# Altium PCB PCB1.PcbDoc (part 1 of 2)
Units mm, origin at the board's own origin, x right, y up, seen from the top; angles counter-clockwise.
Board outline 79.12 x 76.83 mm, 4 copper layers (Top Layer, GND, PWR, Bottom Layer), stack 1.586 mm thick; 64 components, 60 nets, 265 pads, 89 vias.
Unrouted connection lines stored in the file: 60.
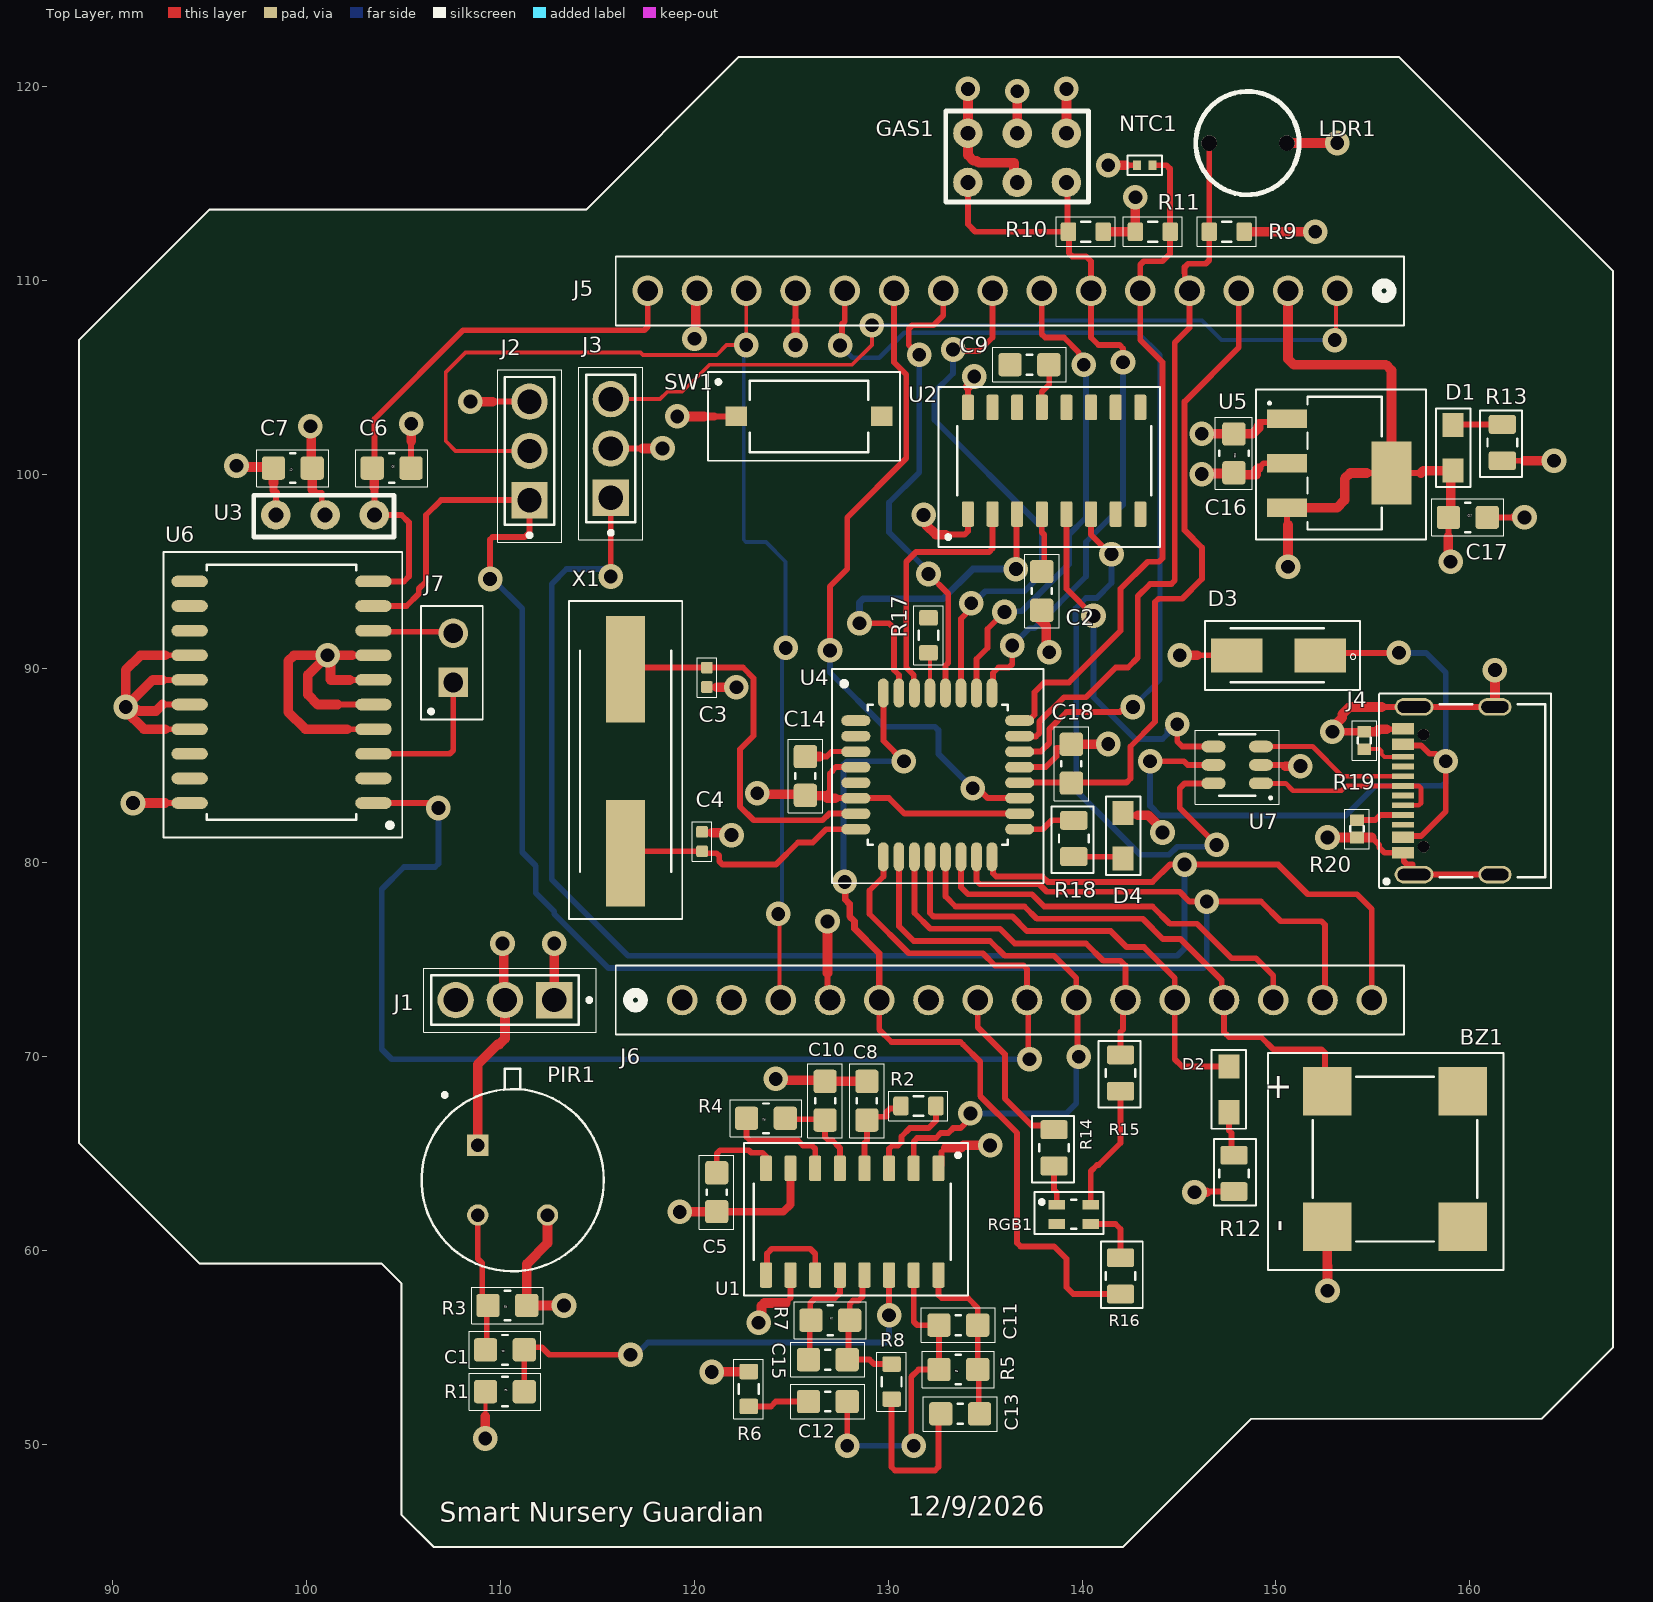
[diagram p0: Top Layer view]
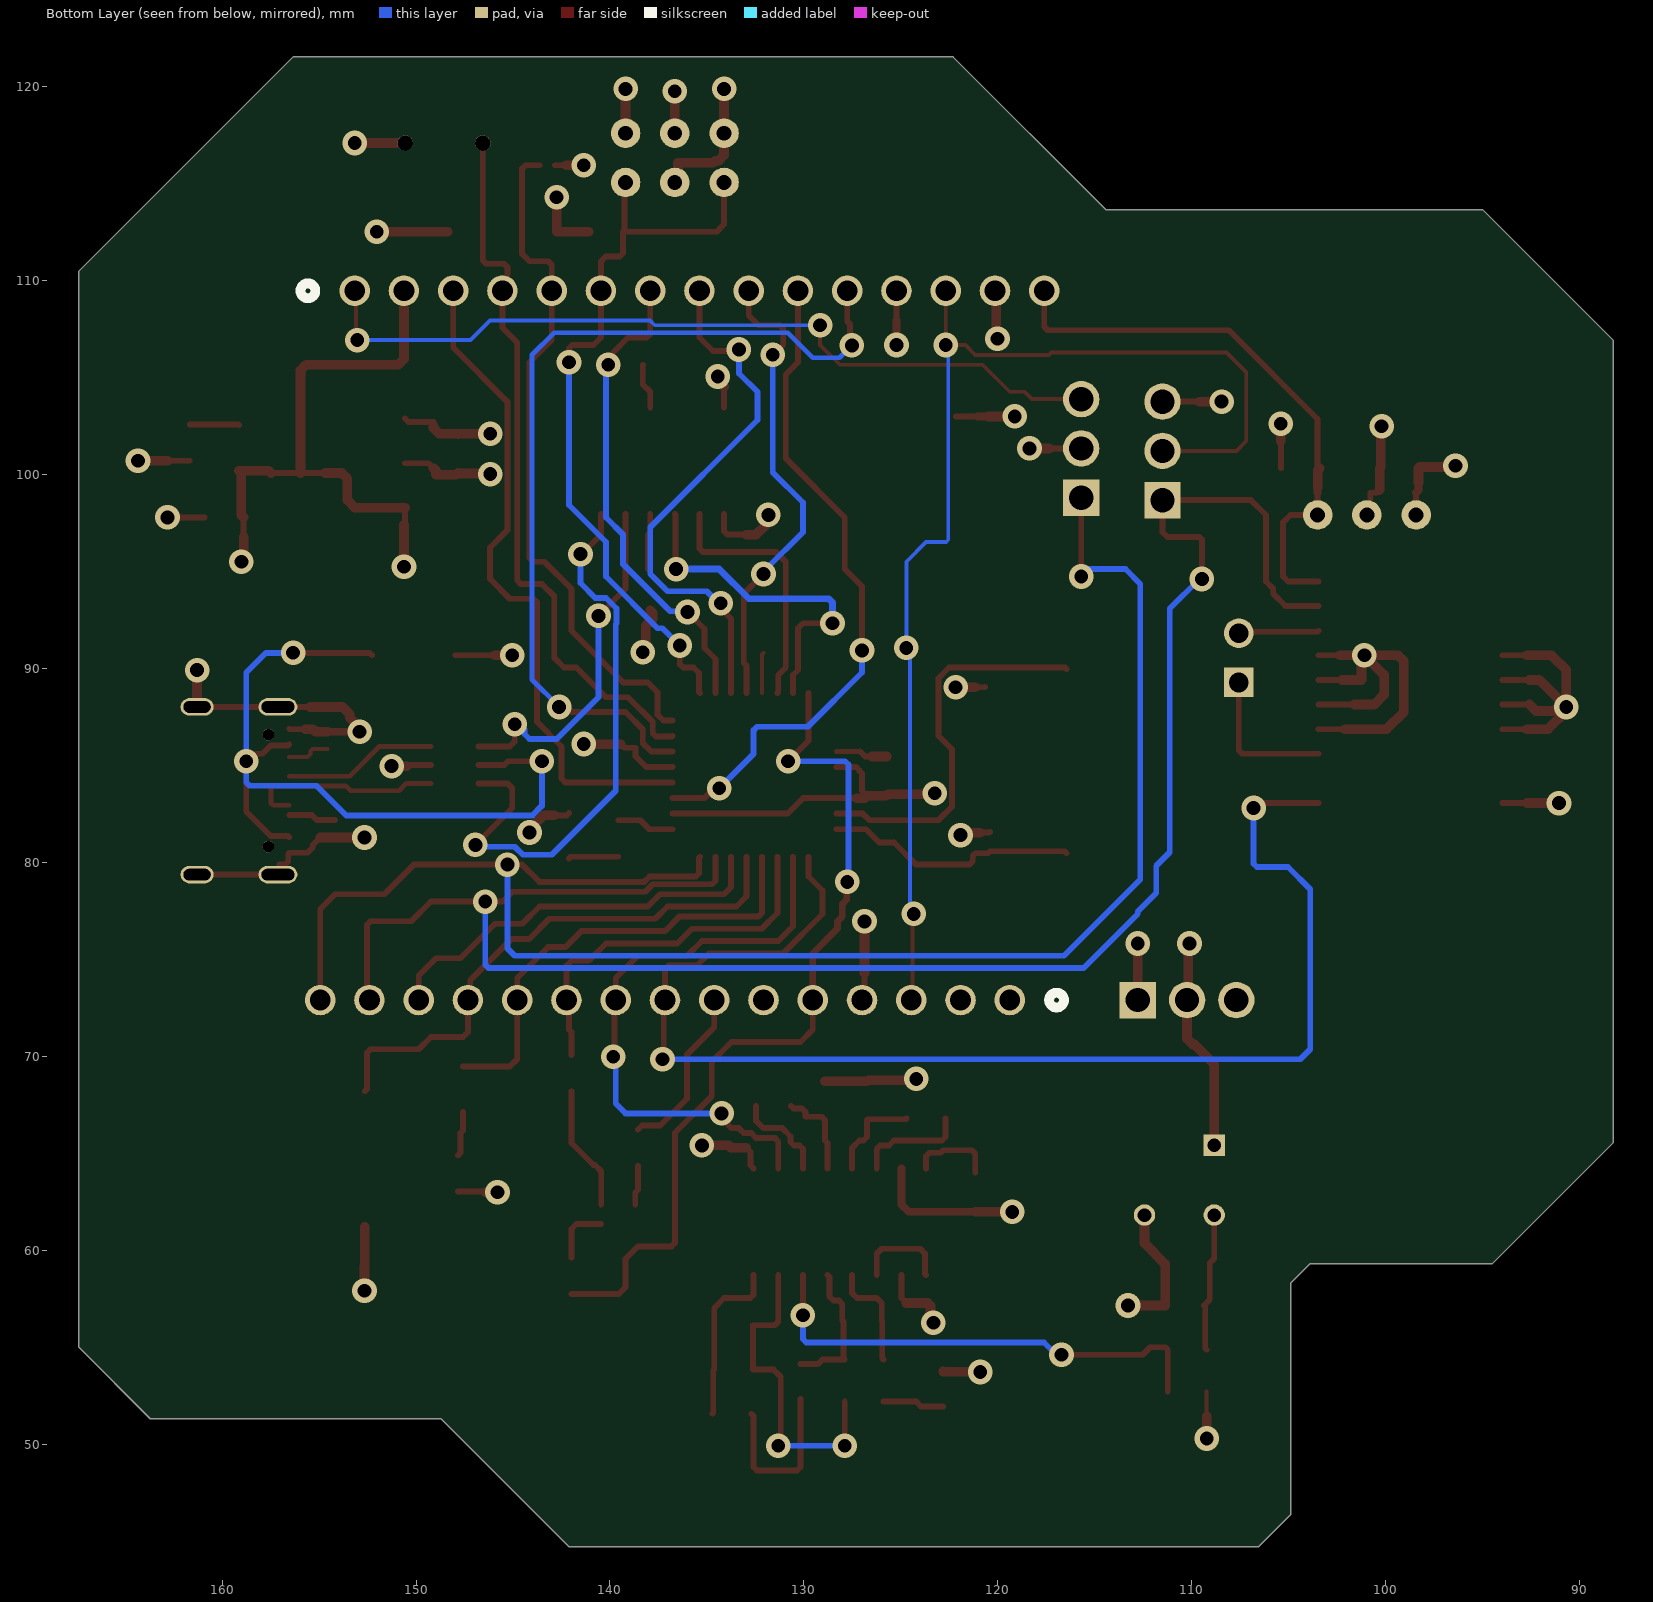
[diagram p1: Bottom Layer view, seen from below]
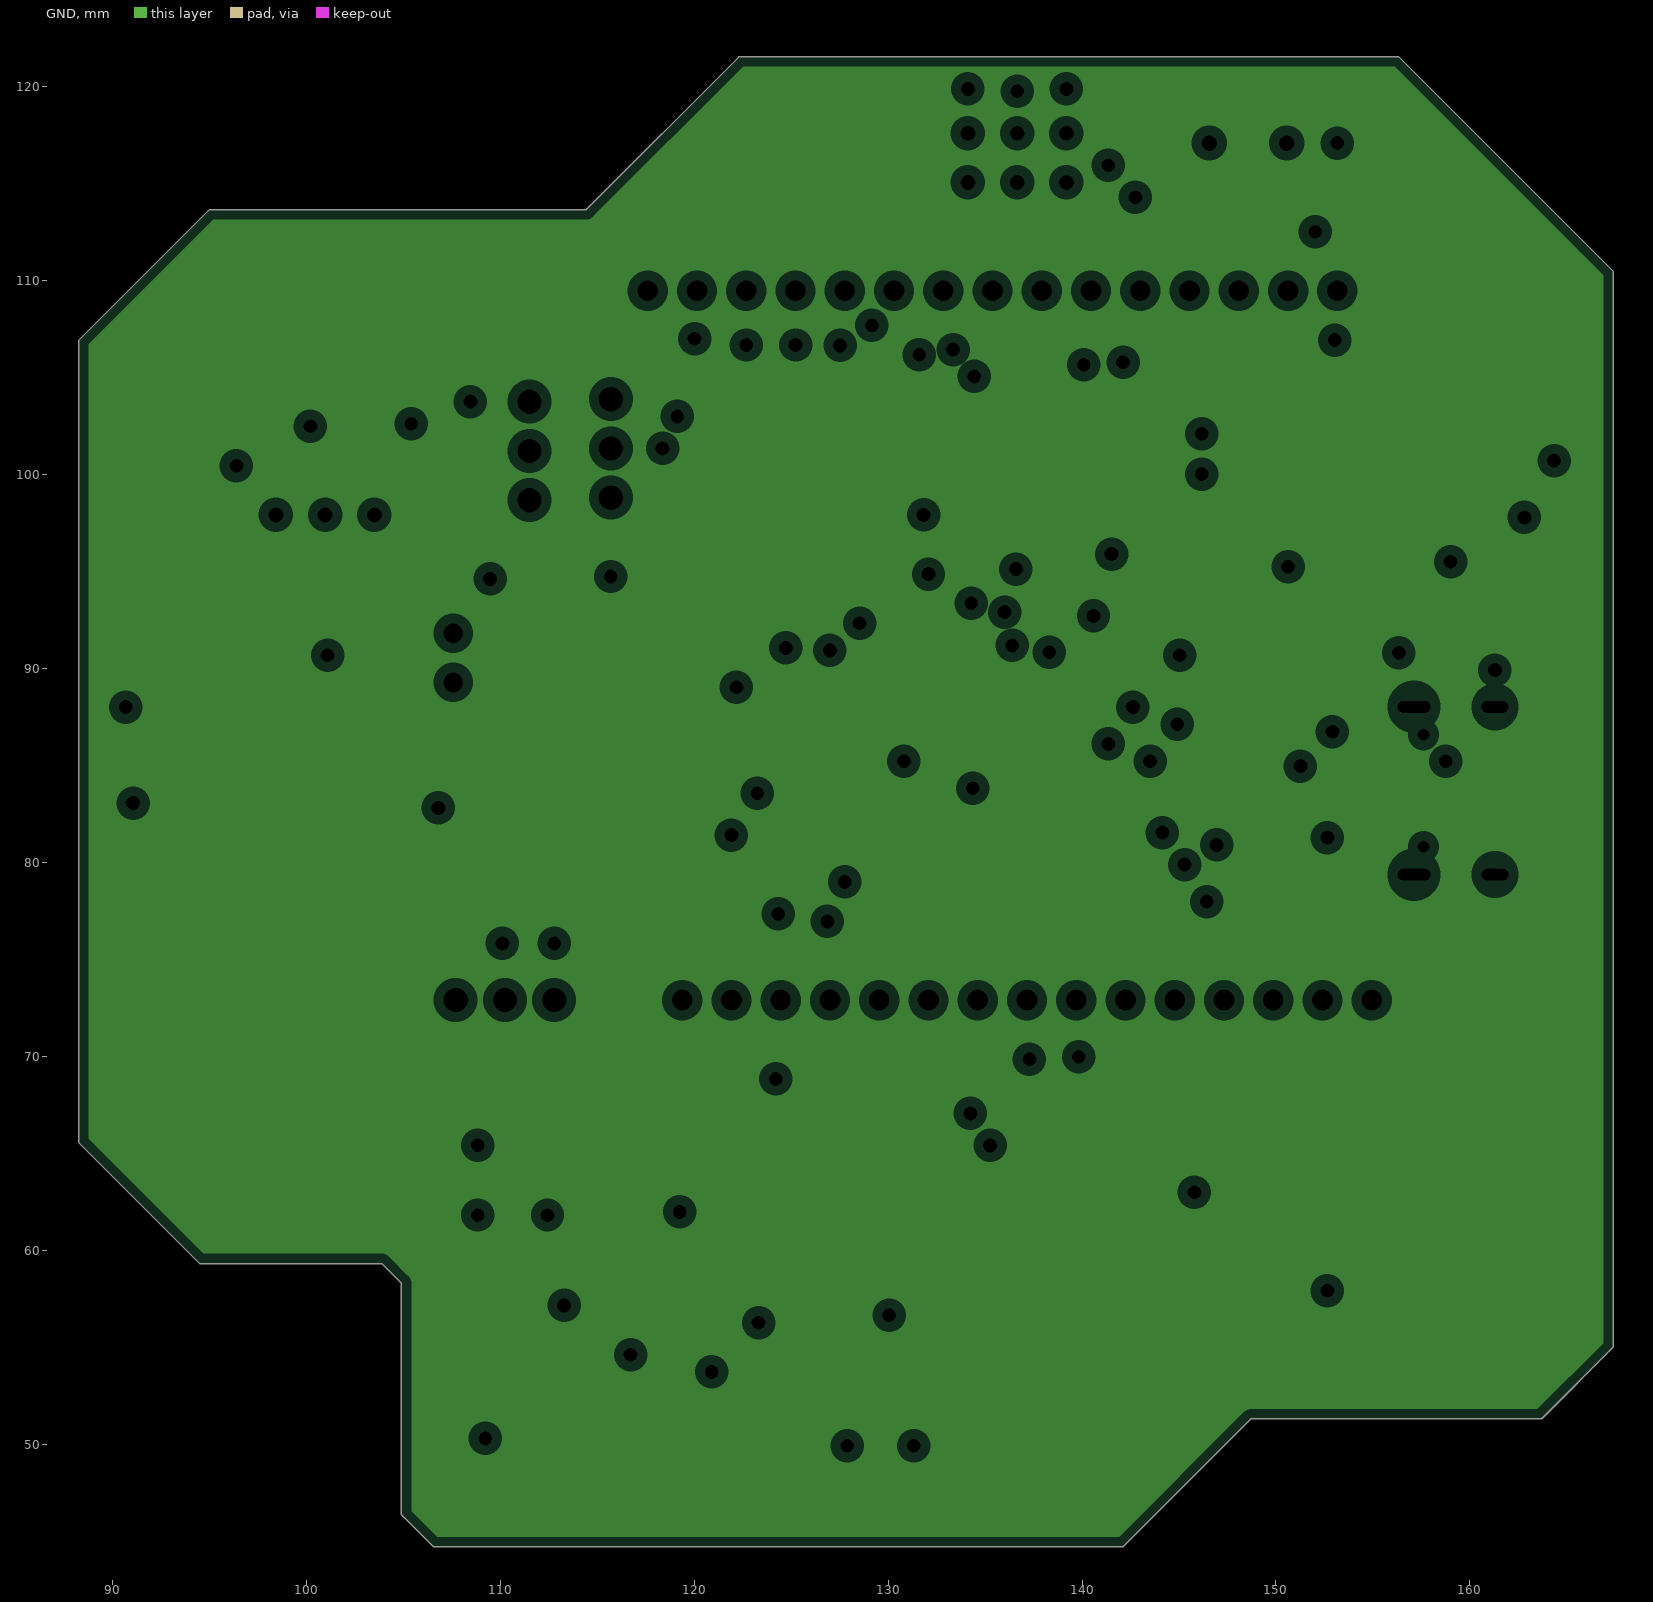
[diagram p2: GND, clearances drawn from the general rule]
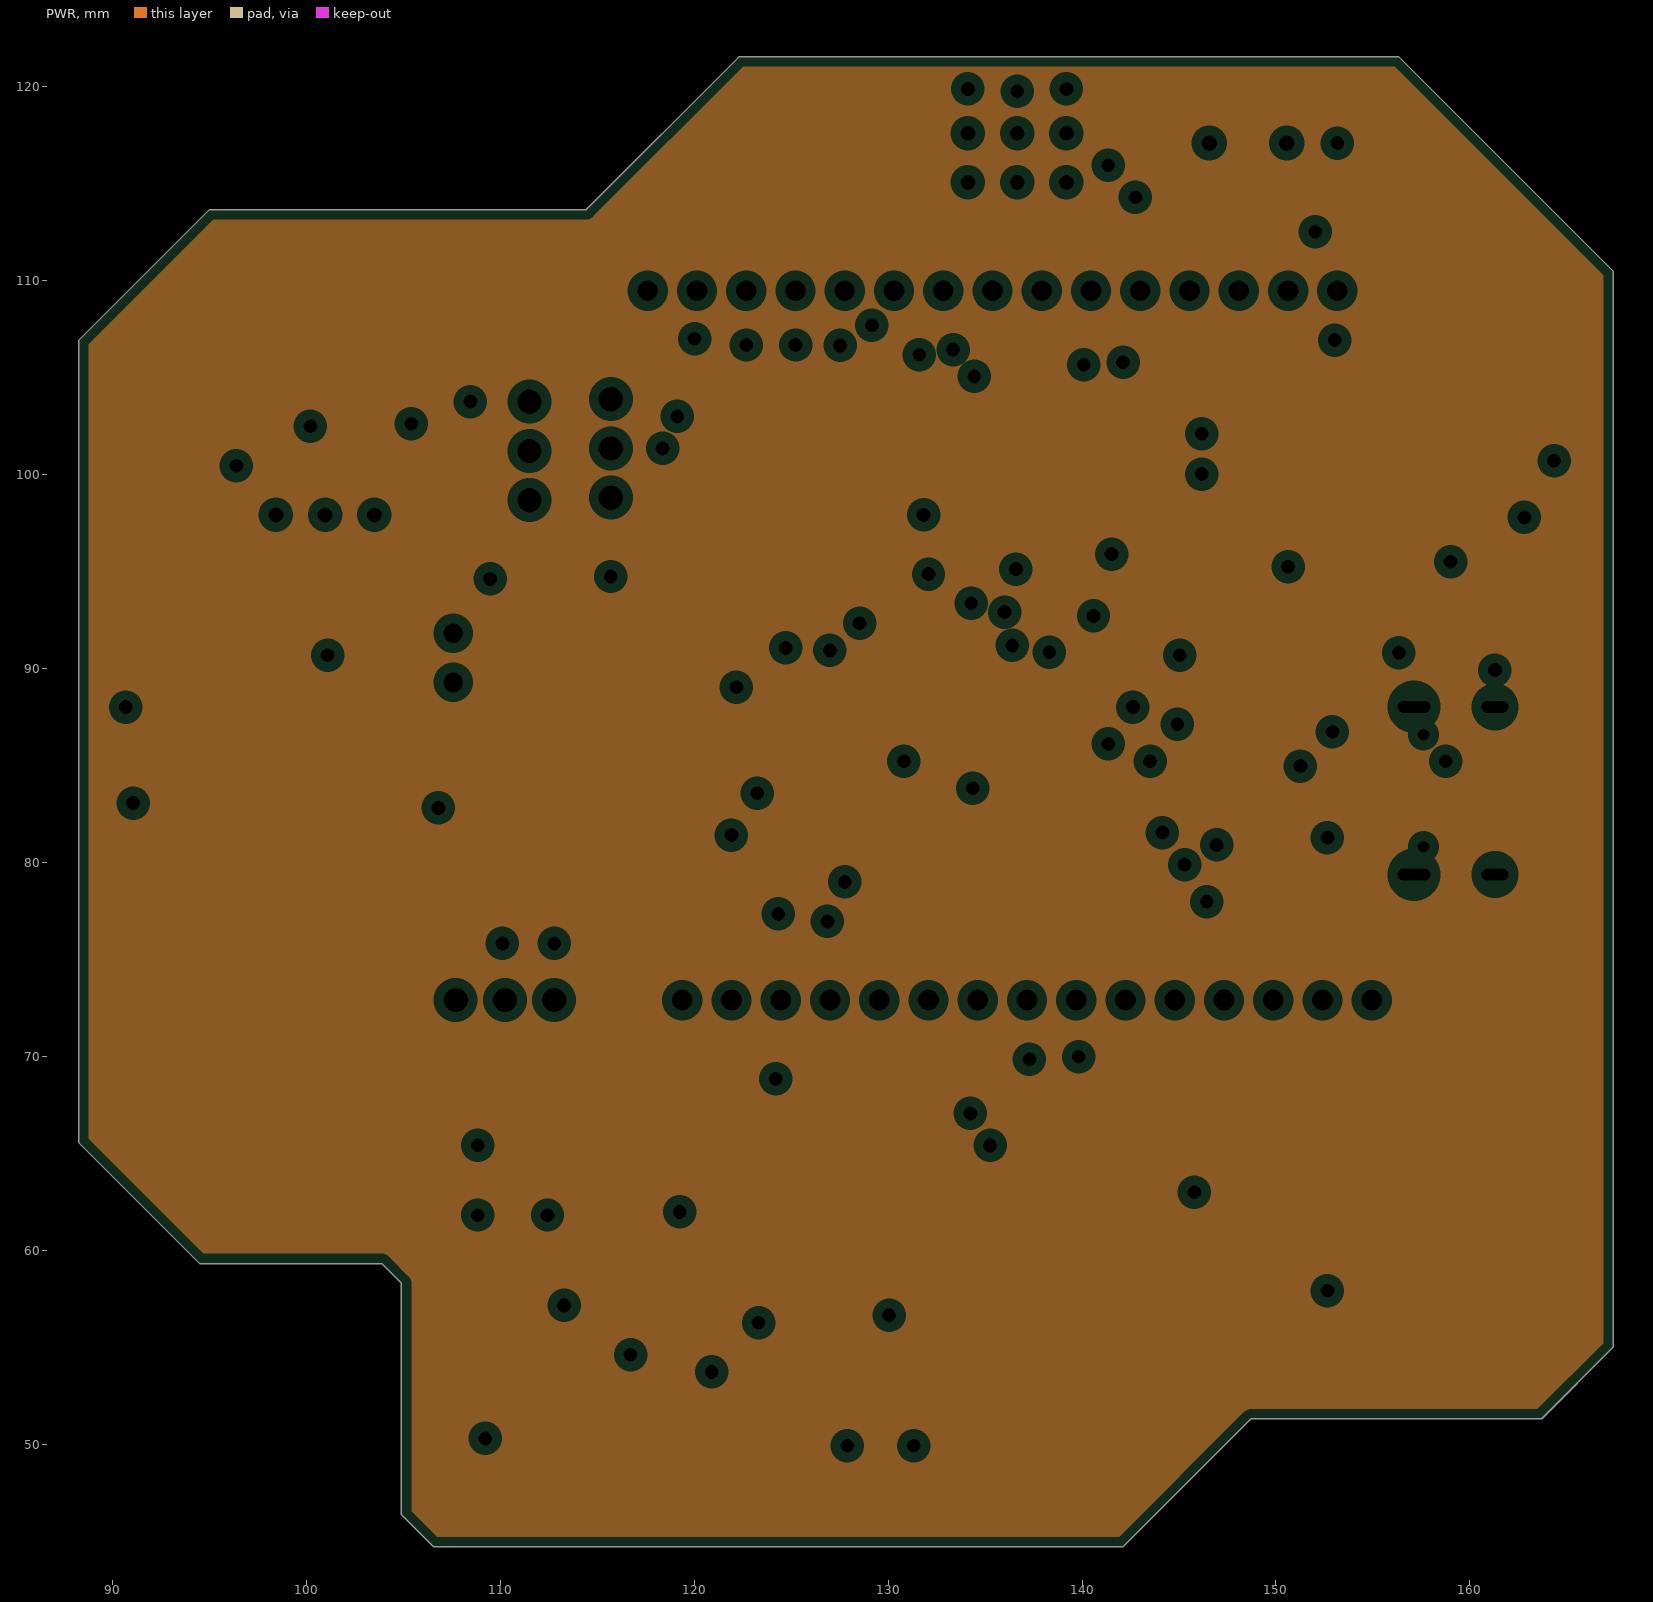
[diagram p3: PWR, clearances drawn from the general rule]
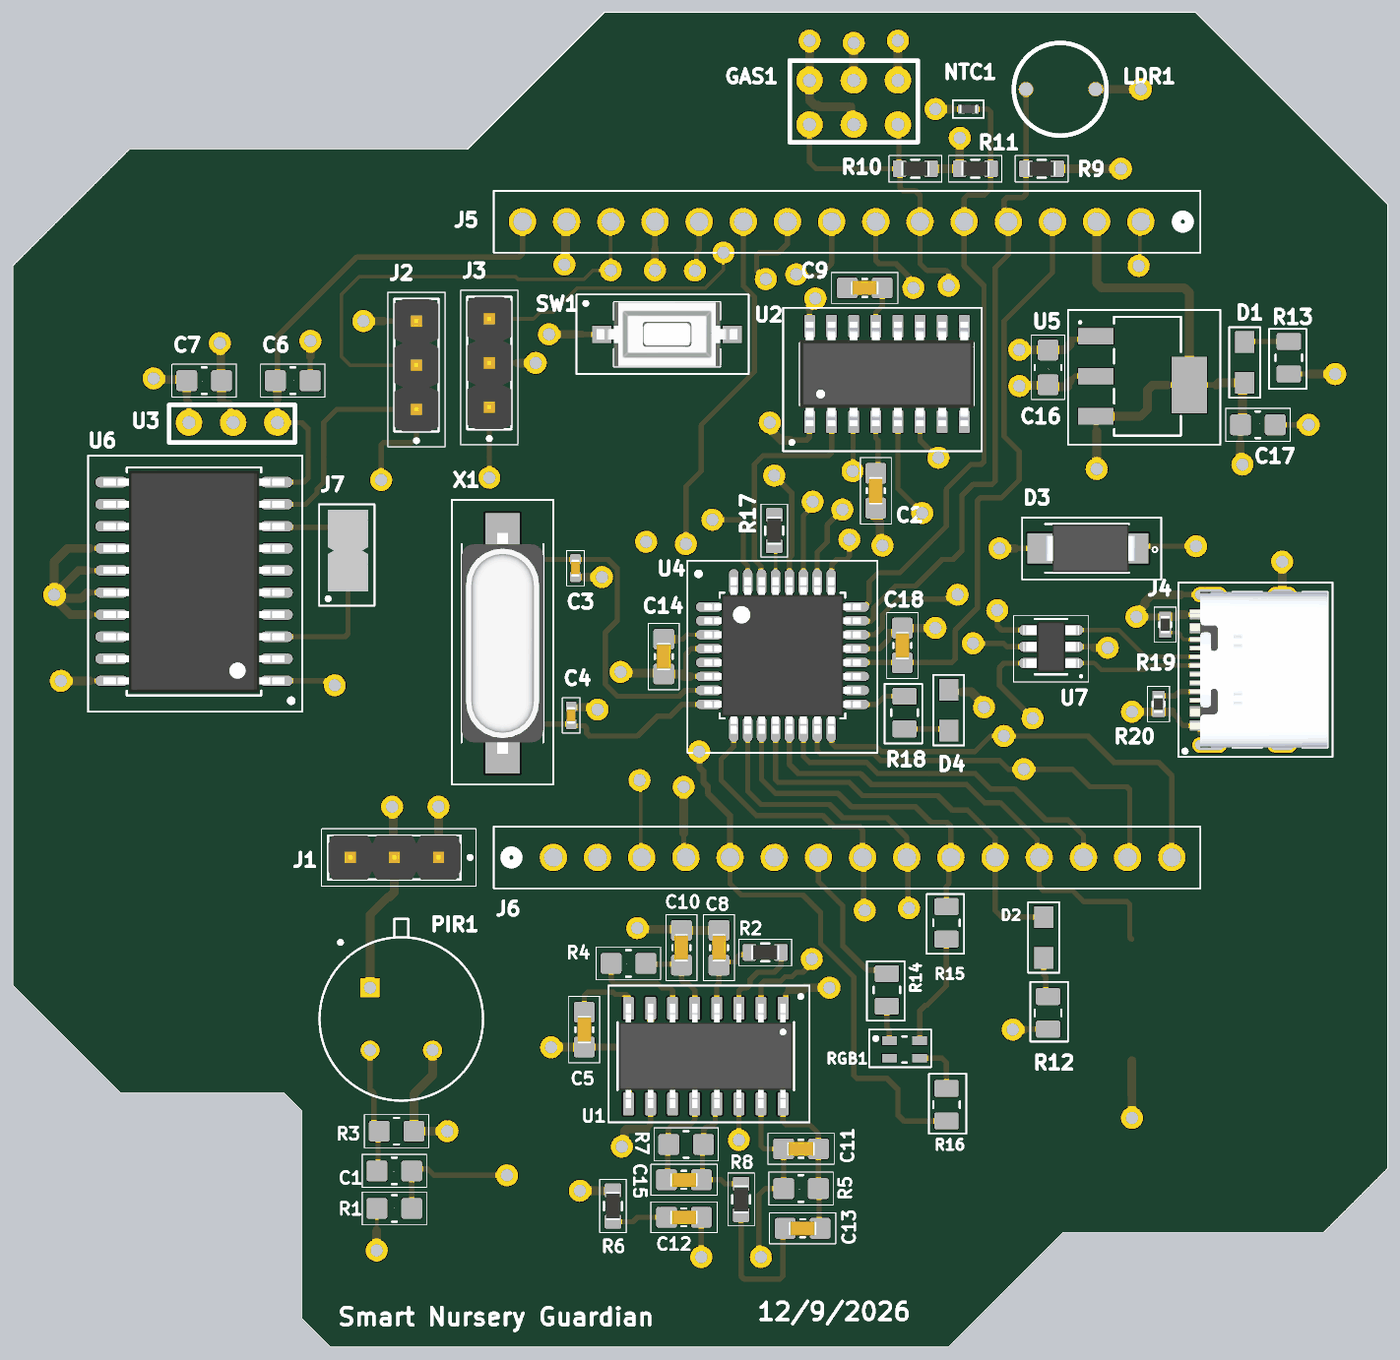
[diagram p4: 3D render of the assembled board from above, using the file's embedded part models]

## Layer stack, top to bottom
Top Solder: solder mask 0.0254, Solder Resist, Dk 4
Top Layer: signal copper 0.035
Dielectric 2: prepreg 0.2104, PP-017, Dk 4.4
GND: plane copper 0.0152, net GND
Dielectric 1: core 1.065, Core-039, Dk 4.6
PWR: plane copper 0.0152, net +5V
Dielectric 3: prepreg 0.2104, PP-017, Dk 4.4
Bottom Layer: signal copper 0.035
Bottom Solder: solder mask 0.0254, Solder Resist, Dk 4

## Board outline
94.488,59.309 103.886,59.309 104.902,58.293 104.902,46.355 106.553,44.704 142.113,44.704 148.717,51.308 163.703,51.308 167.386,54.991 167.386,110.49 165.989,111.887 156.337,121.539 122.301,121.539 114.427,113.665 94.996,113.665 88.265,106.934 88.265,65.532

## Design rules (kind name [scope] priority, off if disabled: settings)
BoardOutlineClearance [All] p1: gap=0.3 ignorepadtopadclearanceinfootprint=FALSE
Clearance [All] p1: gap=0.1 ignorepadtopadclearanceinfootprint=FALSE except(0.5: Via-Via Via-Fill Via-Poly Via-Region Via-Text Via-Hole)
MinimumSolderMaskSliver [All] p1: minsoldermaskwidth=0.127
PlaneClearance [All] p1: clearance=0.508
PlaneConnect [All] p1: planeconnectstyle=Relief reliefexpansion=0.508 reliefentries=4 reliefconductorwidth=0.254 reliefairgap=0.254
PolygonConnect [All] p1: connectstyle=Relief reliefconductorwidth=0.254 reliefentries=4 polygonreliefangle="90 Angle" airgapwidth=0.254
RoutingVias [All] p1: holewidth=0.3 width=0.6 viastyle="Through Hole" minholewidth=0.2 minwidth=0.45 maxholewidth=0.711 maxwidth=1.27
SilkToSilkClearance [All] p1: silktosilkclearance=0.15
SilkToSolderMaskClearance [IsPad] p1: minsilkscreentomaskgap=0.15 clearancetoexposedcopper=TRUE
SolderMaskExpansion [All] p1: expansion=0.05 istentingtop=FALSE
SupplyNets "Schematic Supply Nets_4" [InNet('VBUS')] p1: voltage=0.000
SupplyNets "Schematic Supply Nets_3" [InNet('+5V')] p2: voltage=0.000
SupplyNets "Schematic Supply Nets_2" [InNet('GND')] p3: voltage=0.000
SupplyNets "Schematic Supply Nets_1" [InNet('+3v3')] p4: voltage=0.000
SupplyNets "Schematic Supply Nets" [InNet('vin')] p5: voltage=0.000
Width [All] p1: maxlimit=5 minlimit=0.1 preferedwidth=0.2
25 further rules are at their usual default settings.

## Components (designator, comment, footprint, x,y, rotation, side; value= is the part's Value field where it differs from the comment)
BZ1 "5V Buzzer" Buzzer 201.859,75.748 r180 top
C1 "10uF" cap 110.236,54.864 r180 top
C2 "100nF" CAP_0603_100nf 138.43,94.631 r270 top
C3 "22pF" CAP_0402_22PF 120.65,89.543 r270 top
C4 "22pF" CAP_0402_22PF 120.403,81.071 r90 top
C5 "10nF" CAP_0603_100nf 121.666,63.627 r270 top
C6 "10uF" cap 104.394,100.33 r0 top
C7 "10uF" cap 99.298,100.33 r180 top
C8 "10nF" CAP_0603_100nf 128.397,67.072 r90 top
C9 "100nF" CAP_0603_100nf 137.922,105.156 r180 top
C10 "10nF" CAP_0603_100nf 126.238,67.072 r90 top
C11 "10nF" CAP_0603_100nf 134.255,55.626 r180 top
C12 "47uF" CAP_0603_100nf 126.254,52.705 r0 top
C13 "10nF" CAP_0603_100nf 134.35,51.054 r180 top
C14 "100nF" CAP_0603_100nf 125.222,83.82 r90 top
C15 "10nF" CAP_0603_100nf 126.254,54.864 r0 top
C16 "10uF" cap 147.828,101.092 r270 top
C17 "10uF" cap 159.893,97.79 r0 top
C18 "100nF" CAP_0603_100nf 138.938,84.455 r90 top
D1 "LED" LED_0805 159.385,106.077 r90 top
D2 "LED_0805" LED_0805 147.32,63.595 r270 top
D3 "SS14 DIODE" "SS14 DIODE" 150.146,91.567 r180 top
D4 "LED_0805" LED_0805 142.367,86.074 r90 top
GAS1 "gas_sensor" "gas_sensor - duplicate" 133.985,115.189 r270 top
J1 "Servo Pins" PIN_HEADER_1X3 112.649,73.025 r180 top
J2 "PIN_HEADER_1X3" PIN_HEADER_1X3 111.633,98.806 r90 top
J3 "PIN_HEADER_1X3" PIN_HEADER_1X3 115.824,98.933 r90 top
J4 "USB_C" USB_TYPE_C_16_PINS 159.131,80.645 r90 top
J5 "Analog Side" PIN_HEADER_1X15 135.382,109.474 r0 top
J6 "Digital Side" PIN_HEADER_1X15 137.16,72.898 r180 top
J7 "Motor Pins" PIN_HEADER_1X2 107.569,90.551 r90 top
LDR1 "LDR" LDR 150.558,117.094 r180 top
NTC1 "NTC" NTC 143.237,115.951 r180 top
PIR1 "PIR Sensor" "PIR_MOTION SENSOR" 110.635,63.609 r270 top
R1 "100kΩ" RESC2013X55N 110.236,52.705 r0 top
R2 "10KΩ" RES_10K_0603 133.212,67.183 r0 top
R3 "100kΩ" RESC2013X55N 110.363,57.15 r180 top
R4 "1MΩ" RESC2013X55N 123.698,66.802 r180 top
R5 "1MΩ" RESC2013X55N 133.62,53.848 r180 top
R6 "10KΩ" RES_10K_0603 122.555,51.192 r270 top
R7 "1MΩ" RESC2013X55N 127.016,56.388 r0 top
R8 "10KΩ" RES_10K_0603 129.921,51.573 r270 top
R9 "10KΩ" RES_10K_0603 149.109,112.268 r0 top
R10 "10KΩ" RES_10K_0603 141.848,112.268 r0 top
R11 "10KΩ" RES_10K_0603 141.997,112.776 r180 top
R12 "330Ω" RESC2013X65N 147.828,63.96 r270 top
R13 "330Ω" RESC2013X65N 161.671,101.648 r90 top
R14 "330Ω" RESC2013X65N 138.557,65.278 r90 top
R15 "330Ω" RESC2013X65N 141.986,69.136 r90 top
R16 "330Ω" RESC2013X65N 141.986,58.674 r270 top
R17 "10KΩ" RES_10K_0603 131.826,90.054 r270 top
R18 "330Ω" RESC2013X65N 139.573,81.231 r90 top
R19 "5.1KΩ" RESC1005X40N 154.559,86.291 r90 top
R20 "5.1KΩ" RESC1005X40N 154.178,81.73 r270 top
RGB1 "RGB" RGB 139.573,61.849 r0 top
SW1 "RESET" RESET_SWITCH 123.758,100.965 r0 top
U1 "BISS0001" BISS0001 128.143,61.468 r270 top
U2 "CH340C" CH340C 138.557,100.711 r90 top
U3 "VoltageRegulator" regulator 98.298,95.504 r270 top
U4 "ATmega328P" TQFP80P900X900X120-32N 132.554,84.512 r0 top
U5 "AMS1117-3V3" SOT230P700X180-4N 153.543,100.584 r0 top
U6 "L293D IC" SOIC127P1040X250-20N 98.718,88.773 r180 top
U7 "USBLC6-2SC6" SOT95P280X145-6N 148,85.024 r180 top
X1 "16MHz Crystal" "16MHz Crystal" 116.459,85.217 r270 top

## Footprints (in the part's own frame and the unit in brackets; to place one, negate y for a bottom-side part, rotate by r counter-clockwise, add the part's x,y. Pads: shape width x height; smd on the part's side, far side on the other; paste and mask are expansions set on the pad)
"16MHz Crystal" [mm]
  rect 5.5x2 smd paste+0 mask+0.102: 1(-4.75,0) 2(4.75,0)
  silkscreen extent -8.25,-2.92 8.13,2.92, body extent -6.35,-2.35 6.35,2.35, height 3.3
BISS0001 [mm]
  rrect25% 1.31x0.62 smd paste+0 mask+0.102: 1(-2.75,4.445) 2(-2.75,3.175) 3(-2.75,1.905) 4(-2.75,0.635) 5(-2.75,-0.635) 6(-2.75,-1.905) 7(-2.75,-3.175) 8(-2.75,-4.445) 9(2.75,-4.445) 10(2.75,-3.175) 11(2.75,-1.905) 12(2.75,-0.635) 13(2.75,0.635) 14(2.75,1.905) 15(2.75,3.175) 16(2.75,4.445)
  silkscreen extent -4.06,-5.59 3.81,5.97, body extent -3,-5 3,5, height 1.8
Buzzer [mm]
  rect 2.5x2.5 smd: 1(42.22,14.549) 2(42.22,7.549) N(49.22,14.549) P(49.22,7.549)
  silkscreen extent 40.13,5.59 52.27,16.76, body extent 41.4,6.8 49.9,15.3, height 1
cap [mm] "Chip Resistor, 2-Leads, Body 2.00x1.27mm, IPC Medium Density"
  rrect25% 1.2x1.2 smd: 1(-1,0) 2(1,0)
  silkscreen extent -1.85,-0.95 1.85,0.95, body extent -1,-0.64 1,0.64, height 0.55
CAP_0402_22PF [mm] "Chip Capacitor, 2-Leads, Body 1.00x0.50mm, IPC Medium Density"
  rrect25% 0.6x0.6 smd: 1(-0.5,0) 2(0.5,0)
  silkscreen extent -1.02,-0.51 1.02,0.51, body extent -0.5,-0.25 0.5,0.25, height 0.55
CAP_0603_100nf [mm]
  rrect25% 1.2x1.2 smd: 1(-0.365,-0.508) 2(1.635,-0.508)
  silkscreen extent -1.27,-1.4 2.54,0.38, body extent -0.17,-0.91 1.44,-0.11, height 0.9
CH340C [mm]
  rrect25% 1.31x0.62 smd: 1(-2.75,4.445) 2(-2.75,3.175) 3(-2.75,1.905) 4(-2.75,0.635) 5(-2.75,-0.635) 6(-2.75,-1.905) 7(-2.75,-3.175) 8(-2.75,-4.445) 9(2.75,-4.445) 10(2.75,-3.175) 11(2.75,-1.905) 12(2.75,-0.635) 13(2.75,0.635) 14(2.75,1.905) 15(2.75,3.175) 16(2.75,4.445)
  silkscreen extent -4.45,-5.46 3.81,5.97, body extent -3,-5 3,5, height 1.8
"gas_sensor - duplicate" [mil]
  round 60 hole 30: 1(-95,205) 2(-95,105) 3(-95,5) 4(5,5) 5(5,105) 6(5,205)
  silkscreen extent -140,-40 45,250
LDR [mm]
  round 0.8 hole 0.8: 1(4,0) 2(0,0)
  silkscreen extent -0.64,-2.67 4.7,2.67
LED_0805 [mm]
  rect 1.25x1.1 smd: 1(-5.874,0.254) 2(-3.524,0.254)
  silkscreen extent -6.73,-0.64 -2.67,1.14
NTC [mm]
  rect 0.4x0.5 smd: 1(-0.4,0) 2(0.4,0)
  silkscreen extent -0.89,-0.51 0.89,0.51, body extent -0.5,-0.25 0.5,0.25, height 0.55
PIN_HEADER_1X2 [mm]
  rect 1.53x1.53 / inner round 1.53 / far side rect 1.53x1.53 hole 1.02: 1(-1.27,0)
  round 1.53 hole 1.02: 2(1.27,0)
  silkscreen extent -3.17,-1.52 2.67,1.65, body extent -2.34,-1.17 2.34,1.17, height 5.33
PIN_HEADER_1X3 [mm]
  rect 1.875x1.875 / inner round 1.875 / far side rect 1.875x1.875 hole 1.25: 1(-0.127,0.127)
  round 1.875 hole 1.25: 2(2.413,0.127) 3(4.953,0.127)
  silkscreen extent -2.29,-1.52 6.6,1.78, body extent -1.4,-1.14 6.22,1.4, height 7.27
PIN_HEADER_1X15 [mil]
  round 62 hole 42: 1(700,0) 2(600,0) 3(500,0) 4(400,0) 5(300,0) 6(200,0) 7(100,0) 8(0,0) 9(-100,0) 10(-200,0) 11(-300,0) 12(-400,0) 13(-500,0) 14(-600,0) 15(-700,0)
  silkscreen extent -765,-70 835,70
"PIR_MOTION SENSOR" [mm]
  rect 1.1x1.1 hole 0.7: 1(-1.796,-1.796)
  round 1.1 hole 0.7: 2(1.796,-1.796) 3(1.796,1.796)
  silkscreen extent -5.75,-4.7 4.7,4.7
regulator [mil]
  round 60 hole 30: 1(-95,205) 2(-95,105) 3(-95,5)
  silkscreen extent -135,-40 -50,245
RES_10K_0603 [mm]
  rrect25% 0.8x0.96 smd: 1(-2.551,0.254) 2(-0.751,0.254)
  silkscreen extent -3.17,-0.51 -0.13,1.02, body extent -2.45,-0.15 -0.85,0.65, height 0.55
RESC1005X40N [mm] "Chip Resistor, 2-Leads, Body 1.00x0.50mm, IPC Medium Density"
  rect 0.6x0.7 smd: 1(-0.45,0) 2(0.45,0)
  silkscreen extent -1.02,-0.64 1.02,0.64, body extent -0.49,-0.25 0.51,0.25, height 0.4
RESC2013X55N [mm] "Chip Resistor, 2-Leads, Body 2.00x1.27mm, IPC Medium Density"
  rrect25% 1.2x1.2 smd: 1(-1,0) 2(1,0)
  silkscreen extent -1.85,-0.95 1.85,0.95, body extent -1,-0.64 1,0.64, height 0.55
RESC2013X65N [mm] "Chip Resistor, 2-Leads, Body 2.00x1.27mm, IPC Medium Density"
  rrect25% 0.975x1.4 smd: 1(0.938,0) 2(-0.937,0)
  silkscreen extent -1.78,-1.02 1.65,1.14, body extent -1,-0.64 1,0.64, height 0.65
RESET_SWITCH [mm]
  rect 1.1x1 smd: 1(-1.591,2.032) 2(5.909,2.032)
  silkscreen extent -3.05,-0.25 6.86,4.32, body extent -1.89,0.18 6.21,3.88, height 2.5
RGB [mm]
  rect 0.85x0.5 smd: 1(-0.875,0.5) 2(0.875,0.5) 3(-0.875,-0.5) 4(0.875,-0.5)
  silkscreen extent -2.03,-1.02 1.52,1.14
SOIC127P1040X250-20N [mm] "SOIC, 20-Leads, Body 12.75x7.50mm, Pitch 1.27mm, IPC Medium Density"
  oval 1.875x0.6 smd: 1(-4.737,5.715) 2(-4.737,4.445) 3(-4.737,3.175) 4(-4.737,1.905) 5(-4.737,0.635) 6(-4.737,-0.635) 7(-4.737,-1.905) 8(-4.737,-3.175) 9(-4.737,-4.445) 10(-4.737,-5.715) 11(4.738,-5.715) 12(4.738,-4.445) 13(4.738,-3.175) 14(4.738,-1.905) 15(4.738,-0.635) 16(4.738,0.635) 17(4.738,1.905) 18(4.738,3.175) 19(4.738,4.445) 20(4.738,5.715)
  silkscreen extent -6.22,-7.24 6.1,7.49, body extent -5.21,-6.38 5.21,6.38, height 2.5
SOT95P280X145-6N [mm] "SOT23, 6-Leads, Body 2.93x2.80mm, Pitch 0.95mm, IPC Medium Density"
  oval 1.25x0.6 smd: 1(-1.225,0.95) 2(-1.225,0) 3(-1.225,-0.95) 4(1.225,-0.95) 5(1.225,0) 6(1.225,0.95)
  silkscreen extent -2.16,-1.78 2.16,2.03, body extent -1.6,-1.46 1.6,1.46, height 1.45
SOT230P700X180-4N [mm] "SOT223, 4-Leads, Body 6.51x7.00mm (avg), Pitch 2.30mm, IPC Medium Density"
  rect 2.05x0.95 smd: 1(-2.975,0) 2(-2.975,-2.3) 3(-2.975,2.3)
  rect 2.05x3.25 smd: 4(2.413,-0.508)
  silkscreen extent -4.57,-3.94 4.19,3.81, body extent -1.75,-3.25 1.75,3.25, height 1.8
"SS14 DIODE" [mm]
  rect 2.65x1.75 smd paste+0 mask+0.102: P1(-2.127,0.889) P2(2.173,0.889)
  silkscreen extent -4.19,-0.89 3.81,2.67, body extent -2.73,-0.47 2.47,2.25, height 2.5
TQFP80P900X900X120-32N [mm] "TQFP, 32-Leads, Body 7.00x7.00mm, Pitch 0.80mm, IPC Medium Density"
  oval 1.5x0.55 smd: 1(-4.225,2.8) 2(-4.225,2) 3(-4.225,1.2) 4(-4.225,0.4) 5(-4.225,-0.4) 6(-4.225,-1.2) 7(-4.225,-2) 8(-4.225,-2.8) 17(4.225,-2.8) 18(4.225,-2) 19(4.225,-1.2) 20(4.225,-0.4) 21(4.225,0.4) 22(4.225,1.2) 23(4.225,2) 24(4.225,2.8)
  oval 0.55x1.5 smd: 9(-2.8,-4.225) 10(-2,-4.225) 11(-1.2,-4.225) 12(-0.4,-4.225) 13(0.4,-4.225) 14(1.2,-4.225) 15(2,-4.225) 16(2.8,-4.225) 25(2.8,4.225) 26(2,4.225) 27(1.2,4.225) 28(0.4,4.225) 29(-0.4,4.225) 30(-1.2,4.225) 31(-2,4.225) 32(-2.8,4.225)
  silkscreen extent -5.46,-5.59 5.46,5.46, body extent -4.5,-4.5 4.5,4.5, height 1.2
USB_TYPE_C_16_PINS [mm]
  rect 0.6x1.14 smd mask+0.05: A1(-0.152,2.591) A4(0.648,2.591) A9(5.448,2.591) A12(6.248,2.591)
  rect 0.3x1.14 smd mask+0.05: A5(1.798,2.591) A6(2.798,2.591) A7(3.298,2.591) A8(4.298,2.591) B5(4.798,2.591) B6(3.798,2.591) B7(2.298,2.591) B8(1.298,2.591)
  oval 0.9x2 hole 0.6 slot 1.7 at 90 deg: S1(-1.277,2.011) S2(7.373,2.011)
  oval 0.9x1.7 hole 0.6 slot 1.4 at 90 deg: S3(-1.277,-2.159) S4(7.373,-2.159)
  round 0.6 hole 0.6 unplated: ""(0.158,1.521) ""(5.938,1.521)
  silkscreen extent -1.97,-5.05 8.07,3.81, body extent -1.42,-4.76 7.52,3.15, height 3.31

## Part data
BZ1: "Electro-Magnetic Buzzer (SMD Type)", MFR=Huaneng, MFR part #=MLT-8530, ComponentLink1Description="New link", ComponentLink1URL=https://www.lcsc.com/product-detail/C94599.html, ComponentLink2Description=Datasheet, ComponentLink2URL=https://www.lcsc.com/datasheet/C94599.pdf?spm=wm.sxq.inf.ggs&lcsc_vid=EVULUAZXQgMNAwVTEQcNAVxTFlNbX1YFFVgNBV1RQ1kxVlNeTlFaV1ReR1hfUjsOAxUeFF5JWAYLCg0IHk8JCAsBGwRABAsLWA%3D%3D, supplier=LCSC, supplier part #=C94599
C1 C6 C7 C16 C17: "CAP CER 10uF 25V X5R 0805", MFR="Taiyo Yuden", MFR part #=TMK212BBJ106KG-T, ComponentLink1Description="New link", ComponentLink1URL=https://www.lcsc.com/product-detail/C386085.html?s_z=n_q_t_capacitor%25200805%2520&spm=wm.fly.bg.0.xh___wm.ssy.tc.0.tz&lcsc_vid=RQUMVgBfFQNaX1cDEQBcUQJeElRWU1MCTwJYVlNRQlExVlNeTlBaUldRQ1hZXzsOAxUeFF5JWBYZEEoKFBINSQcJGk4dAgUUFAk%3D, ComponentLink2Description=datasheet, ComponentLink2URL=https://www.lcsc.com/datasheet/C386085.pdf?spm=wm.sxq.inf.ggs___wm.fly.bg.0.xh&lcsc_vid=RQUMVgBfFQNaX1cDEQBcUQJeElRWU1MCTwJYVlNRQlExVlNeTlBaUldRQ1hZXzsOAxUeFF5JWBYZEEoKFBINSQcJGk4dAgUUFAk%3D, supplier=lcsc, supplier part #=C386085
C2 C9 C14 C18: "CAP CER 100nF 50V X7R 0603", MFR="Samsung Electro-Mechanics", MFR part #=CL10B104KB8NNNC, ComponentLink1Description="New link", ComponentLink1URL=https://www.lcsc.com/product-detail/C1591.html?s_z=n_q_p_cap%2520100n%2520&spm=wm.ssy.bg.0.xh&lcsc_vid=EgReBFUDQwddVldUQgMNAlFTFlRdVlRRRAUNAVZRRlIxVlNeQFRWUFBTQ1lcVjsOAxUeFF5JWBYZEEoKFBINSQcJGk4NBhADEA4cHktQQlBADxALGw%3D%3D, ComponentLink2Description="data sheet", ComponentLink2URL=https://www.lcsc.com/datasheet/C1591.pdf?spm=wm.sxq.inf.ggs___wm.ssy.bg.0.xh&lcsc_vid=EgReBFUDQwddVldUQgMNAlFTFlRdVlRRRAUNAVZRRlIxVlNeQFRWUFBTQ1lcVjsOAxUeFF5JWBYZEEoKFBINSQcJGk4NBhADEA4cHktQQlBADxALGw%3D%3D, supplier=LCSC, supplier part #=C1591
C3 C4: "CAP CER 22pF 50V NP0 0402", MFR=YAGEO, MFR part #=CC0402JRNPO9BN220, ComponentLink1Description="New link", ComponentLink1URL=https://www.lcsc.com/product-detail/C106203.html?s_z=n_q_t_22pf&spm=wm.fly.bg.4.xh___wm.ssy.tc.0.tz&lcsc_vid=EVULUAZXQgMNAwVTEQcNAVxTFlNbX1YFFVgNBV1RQ1kxVlNeT1lcV1RUTlRbVzsOAxUeFF5JWBYZEEoKFBINSQcJGk4eFQsCAgIaSgADAwAHC0slRlNYUFJIHxUDCw%3D%3D, ComponentLink2Description=datasheet, ComponentLink2URL=https://www.lcsc.com/datasheet/C106203.pdf?spm=wm.sxq.inf.ggs___wm.fly.bg.4.xh&lcsc_vid=EVULUAZXQgMNAwVTEQcNAVxTFlNbX1YFFVgNBV1RQ1kxVlNeT1lcV1RUTlRbVzsOAxUeFF5JWBYZEEoKFBINSQcJGk4eFQsCAgIaSgADAwAHC0slRlNYUFJIHxUDCw%3D%3D, supplier=LCSC, supplier part #=C106203
C5 C8 C10 C11 C13 C15: "CAP CER 10nF 50V X7R 0603", MFR=YAGEO, MFR part #=CC0603KRX7R9BB103, ComponentLink1Description="New link", ComponentLink1URL=https://www.lcsc.com/product-detail/C100042.html?s_z=n_q_t_10NF&spm=wm.fly.bg.1.xh___wm.ssy.tc.0.tz&lcsc_vid=EVULUAZXQgMNAwVTEQcNAVxTFlNbX1YFFVgNBV1RQ1kxVlNeTlBbXl1QRlNbUzsOAxUeFF5JWBYZEEoKFBINSQcJGk4eFQsCAgIaSgADAwAHC0slRVhdVFZeR08GEwkK, ComponentLink2Description="data sheet", ComponentLink2URL=https://www.lcsc.com/datasheet/C100042.pdf?spm=wm.sxq.inf.ggs___wm.fly.bg.1.xh&lcsc_vid=EVULUAZXQgMNAwVTEQcNAVxTFlNbX1YFFVgNBV1RQ1kxVlNeTlBbXl1QRlNbUzsOAxUeFF5JWBYZEEoKFBINSQcJGk4eFQsCAgIaSgADAwAHC0slRVhdVFZeR08GEwkK, supplier=LCSC, supplier part #=C100042
C12: "CAP CER 47uF 6.3V X5R 0603", MFR=muRata, MFR part #=GRM188R60J476ME15D, ComponentLink1Description="New link", ComponentLink1URL=https://www.lcsc.com/product-detail/C140782.html?s_z=n_q_t_47UF&spm=wm.fly.bg.10.xh___wm.ssy.tc.2.tz&lcsc_vid=EVULUAZXQgMNAwVTEQcNAVxTFlNbX1YFFVgNBV1RQ1kxVlNeTlNfUVJXQ1JfVzsOAxUeFF5JWBYZEEoKFBINSQcJGk4%3D, ComponentLink2Description="data sheet", ComponentLink2URL=https://www.lcsc.com/datasheet/C140782.pdf?spm=wm.sxq.inf.ggs___wm.fly.bg.10.xh&lcsc_vid=EVULUAZXQgMNAwVTEQcNAVxTFlNbX1YFFVgNBV1RQ1kxVlNeTlNfUVJXQ1JfVzsOAxUeFF5JWBYZEEoKFBINSQcJGk4%3D, supplier=LCSC, supplier part #=C140782
D1: library part LED_0805, "LED RED 0805 SMD", MFR=YONGYUTAI, MFR part #=YLED0805R, ComponentLink1Description="New link", ComponentLink1URL=https://www.lcsc.com/product-detail/C19171391.html?s_z=n_q_t_0805%2520LED&spm=wm.fly.bg.0.xh___wm.ssy.tc.0.tz&lcsc_vid=T1QNA1xeQFcIAlReRFQMVgBVFlhZUV1RE1VaUQcHQgQxVlNeQVZfVlRRQFZdUTsOAxUeFF5JWBYZEEoKFBINSQcJGk4NBhADEA4cHktSRlNADxALGw%3D%3D, ComponentLink2Description="data sheet", ComponentLink2URL=https://www.lcsc.com/datasheet/C19171391.pdf?spm=wm.sxq.inf.ggs___wm.fly.bg.0.xh&lcsc_vid=T1QNA1xeQFcIAlReRFQMVgBVFlhZUV1RE1VaUQcHQgQxVlNeQVZfVlRRQFZdUTsOAxUeFF5JWBYZEEoKFBINSQcJGk4NBhADEA4cHktSRlNADxALGw%3D%3D, supplier=LCSC, supplier part #=C19171391
D2 D4: "LED RED 0805 SMD", MFR=YONGYUTAI, MFR part #=YLED0805R, ComponentLink1Description="New link", ComponentLink1URL=https://www.lcsc.com/product-detail/C19171391.html?s_z=n_q_t_0805%2520LED&spm=wm.fly.bg.0.xh___wm.ssy.tc.0.tz&lcsc_vid=T1QNA1xeQFcIAlReRFQMVgBVFlhZUV1RE1VaUQcHQgQxVlNeQVZfVlRRQFZdUTsOAxUeFF5JWBYZEEoKFBINSQcJGk4NBhADEA4cHktSRlNADxALGw%3D%3D, ComponentLink2Description="data sheet", ComponentLink2URL=https://www.lcsc.com/datasheet/C19171391.pdf?spm=wm.sxq.inf.ggs___wm.fly.bg.0.xh&lcsc_vid=T1QNA1xeQFcIAlReRFQMVgBVFlhZUV1RE1VaUQcHQgQxVlNeQVZfVlRRQFZdUTsOAxUeFF5JWBYZEEoKFBINSQcJGk4NBhADEA4cHktSRlNADxALGw%3D%3D, supplier=LCSC, supplier part #=C19171391
D3: "DIODE SCHOTTKY 40V SMA(DO-214AC)", MFR="MDD(Microdiode Semiconductor)", MFR part #=SS14, ComponentLink1Description="New link", ComponentLink1URL=https://www.lcsc.com/product-detail/C2480.html?s_z=n_q_x_SS14&spm=wm.ssy.em.0.tz&lcsc_vid=EVULUAZXQgMNAwVTEQcNAVxTFlNbX1YFFVgNBV1RQ1kxVlNeTlBYV1VVQ1NWXzsOAxUeFF5JWBYZEEoKFBINSQcJGk4NBhADEA4cHktXRlhXSQwSGg0%3D, ComponentLink2Description=datasheet, ComponentLink2URL=https://www.lcsc.com/datasheet/C2480.pdf?spm=wm.sxq.inf.ggs___wm.ssy.em.0.tz&lcsc_vid=EVULUAZXQgMNAwVTEQcNAVxTFlNbX1YFFVgNBV1RQ1kxVlNeTlBYV1VVQ1NWXzsOAxUeFF5JWBYZEEoKFBINSQcJGk4NBhADEA4cHktXRlhXSQwSGg0%3D, supplier=lcsc, supplier part #=C2480
GAS1: "300ppm~10000ppm Through Hole Gas Sensors", MFR="Zhengzhou Winsen Elec Tech", MFR part #=MQ-2, ComponentLink1Description="New link", ComponentLink1URL=https://www.lcsc.com/product-detail/C99296.html?s_z=n_q_C99296&globalKeyword=C99296, ComponentLink2Description=datasheet, ComponentLink2URL=https://www.lcsc.com/datasheet/C99296.pdf?spm=wm.sxq.inf.ggs&lcsc_vid=RQUMVgBfFQNaX1cDEQBcUQJeElRWU1MCTwJYVlNRQlExVlNeTlBdXlZQQllaVDsOAxUeFF5JWBYZEEoKFBINSQcJGk4NBhADEA4cHkteQlRADxALGw%3D%3D, supplier=lcsc, supplier part #=C99296
J1: library part PIN_HEADER_1X3, "1kV 1 2.54mm Pin Header 3A 2.5mm Through Hole 6mm 3P -40℃~+105℃ 3mm Gold 1x3P Through Hole,P=2.54mm Headers, Male Pins", MFR=hanxia, MFR part #="HX PH254-01-03-Z-L11.5 pcb pin header", ComponentLink1Description="data sheet", ComponentLink1URL=https://www.lcsc.com/datasheet/C52016391.pdf?spm=wm.sxq.inf.ggs___wm.ssy.bg.1.xh&lcsc_vid=EgReBFUDQwddVldUQgMNAlFTFlRdVlRRRAUNAVZRRlIxVlNeQFRZXlFSR1dZVDsOAxUeFF5JWBYZEEoKFBINSQcJGk4NBhADEA4cHktfQVVADxALGw%3D%3D, ComponentLink2Description="New link 1", ComponentLink2URL=https://www.lcsc.com/product-detail/C52016391.html?s_z=n_q_p_Pin%2520Header%25202.54mm%25201x3&spm=wm.ssy.bg.1.xh&lcsc_vid=EgReBFUDQwddVldUQgMNAlFTFlRdVlRRRAUNAVZRRlIxVlNeQFRZXlFSR1dZVDsOAxUeFF5JWBYZEEoKFBINSQcJGk4NBhADEA4cHktfQVVADxALGw%3D%3D, supplier=lcsc, supplier part #=C52016391
J2 J3: "1kV 1 2.54mm Pin Header 3A 2.5mm Through Hole 6mm 3P -40℃~+105℃ 3mm Gold 1x3P Through Hole,P=2.54mm Headers, Male Pins", MFR=hanxia, MFR part #="HX PH254-01-03-Z-L11.5 pcb pin header", ComponentLink1Description="data sheet", ComponentLink1URL=https://www.lcsc.com/datasheet/C52016391.pdf?spm=wm.sxq.inf.ggs___wm.ssy.bg.1.xh&lcsc_vid=EgReBFUDQwddVldUQgMNAlFTFlRdVlRRRAUNAVZRRlIxVlNeQFRZXlFSR1dZVDsOAxUeFF5JWBYZEEoKFBINSQcJGk4NBhADEA4cHktfQVVADxALGw%3D%3D, ComponentLink2Description="New link 1", ComponentLink2URL=https://www.lcsc.com/product-detail/C52016391.html?s_z=n_q_p_Pin%2520Header%25202.54mm%25201x3&spm=wm.ssy.bg.1.xh&lcsc_vid=EgReBFUDQwddVldUQgMNAlFTFlRdVlRRRAUNAVZRRlIxVlNeQFRZXlFSR1dZVDsOAxUeFF5JWBYZEEoKFBINSQcJGk4NBhADEA4cHktfQVVADxALGw%3D%3D, supplier=lcsc, supplier part #=C52016391
J4: "CONN RCPT Type-C 16POS SMD", MFR="Korean Hroparts Elec", MFR part #=TYPE-C-31-M-12, ComponentLink1Description="New link", ComponentLink1URL=https://www.lcsc.com/product-detail/C165948.html?s_z=n_q_p_USB%2520TYPE%2520C&spm=wm.ssy.bg.1.xh&lcsc_vid=T1QNA1xeQFcIAlReRFQMVgBVFlhZUV1RE1VaUQcHQgQxVlNeQFVdUF1RQFBZVDsOAxUeFF5JWBYZEEoKFBINSQcJGk4eFQsCAgIaSgADAwAHC0slT1ZdU0oOAwwC, ComponentLink2Description="data sheet", ComponentLink2URL=https://www.lcsc.com/datasheet/C165948.pdf?spm=wm.sxq.inf.ggs___wm.ssy.bg.1.xh&lcsc_vid=T1QNA1xeQFcIAlReRFQMVgBVFlhZUV1RE1VaUQcHQgQxVlNeQFVdUF1RQFBZVDsOAxUeFF5JWBYZEEoKFBINSQcJGk4eFQsCAgIaSgADAwAHC0slT1ZdU0oOAwwC, supplier=lcsc, supplier part #=C165948
J5 J6: library part PIN_HEADER_1X15, "CONN HEADER 15POS 2.54mm SINGLE ROW TH", MFR=Megastar, MFR part #=ZX-PZ2.54-1-15PZZ, ComponentLink1Description="data sheet", ComponentLink1URL=https://www.lcsc.com/datasheet/C7501269.pdf?spm=wm.sxq.inf.ggs___wm.fly.bg.1.xh&lcsc_vid=EVULUAZXQgMNAwVTEQcNAVxTFlNbX1YFFVgNBV1RQ1kxVlNeTlNeUVFUT1ddXzsOAxUeFF5JWBYZEEoKFBINSQcJGk4eFQsCAgIaSgADAwAHC0slQ1BaVVNWQVlADxALGw%3D%3D, ComponentLink2Description="New link 1", ComponentLink2URL=https://www.lcsc.com/product-detail/C7501269.html?s_z=n_q_t_15P%2520HEADER&spm=wm.fly.bg.1.xh___wm.ssy.tc.0.tz&lcsc_vid=EVULUAZXQgMNAwVTEQcNAVxTFlNbX1YFFVgNBV1RQ1kxVlNeTlNeUVFUT1ddXzsOAxUeFF5JWBYZEEoKFBINSQcJGk4eFQsCAgIaSgADAwAHC0slQ1BaVVNWQVlADxALGw%3D%3D, supplier=lcsc, supplier part #=C7501269
J7: library part PIN_HEADER_1X2, "CONN HEADER 2POS 2.54mm SINGLE ROW TH", MFR=hanxia, MFR part #="HX PZ2.54-1x2P ZZ", ComponentLink1Description="data sheet", ComponentLink1URL=https://www.lcsc.com/product-detail/C32713268.html?s_z=n_q_t_pin%2520header&spm=wm.fly.bg.3.stp___wm.ssy.tc.0.tz&lcsc_vid=EVULUAZXQgMNAwVTEQcNAVxTFlNbX1YFFVgNBV1RQ1kxVlNeTlBYVVZfRlJcUjsOAxUeFF5JWBYZEEoKFBINSQcJGk4eFQsCAgIaSgADAwAHC0slRVZdUVVXWQkaCgg%3D, ComponentLink2Description="New link 1", ComponentLink2URL=https://www.lcsc.com/datasheet/C32713268.pdf?spm=wm.sxq.inf.ggs___wm.fly.bg.3.stp&lcsc_vid=EVULUAZXQgMNAwVTEQcNAVxTFlNbX1YFFVgNBV1RQ1kxVlNeTlBYVVZfRlJcUjsOAxUeFF5JWBYZEEoKFBINSQcJGk4eFQsCAgIaSgADAwAHC0slRVZdUVVXWQkaCgg%3D, supplier=lcsc, supplier part #=C32713268
LDR1: "540nm 50kΩ~100kΩ 5MΩ Through Hole Photoresistors", MFR="NTE Electronics", MFR part #=02-LDR1, ComponentLink1Description="New link", ComponentLink1URL=https://www.lcsc.com/product-detail/C17682488.html?s_z=n_q_LDR%2520C17682488&spm=wm.fly.bg.0.xh&lcsc_vid=RQUMVgBfFQNaX1cDEQBcUQJeElRWU1MCTwJYVlNRQlExVlNeTlBcV1NeRVBbXzsOAxUeFF5JWBYZEEoKFBINSQcJGk4NBhADEA4cHktSRlNADxALGw%3D%3D, ComponentLink2Description=datasheet, ComponentLink2URL=https://www.lcsc.com/datasheet/C17682488.pdf?spm=wm.sxq.inf.ggs___wm.fly.bg.0.xh&lcsc_vid=RQUMVgBfFQNaX1cDEQBcUQJeElRWU1MCTwJYVlNRQlExVlNeTlBcV1NeRVBbXzsOAxUeFF5JWBYZEEoKFBINSQcJGk4NBhADEA4cHktSRlNADxALGw%3D%3D, supplier=lcsc, supplier part #=C17682488
NTC1: "THERMISTOR NTC 10kΩ 3380K 0402", MFR=TDK, MFR part #=NTCG103JF103FT1, ComponentLink1Description="New link", ComponentLink1URL=https://www.lcsc.com/product-detail/C209959.html?s_z=n_q_NTCG103JF103FT1&spm=wm.fly.bg.0.xh&lcsc_vid=EVULUAZXQgMNAwVTEQcNAVxTFlNbX1YFFVgNBV1RQ1kxVlNeTlNfX1xWQVBbUjsOAxUeFF5JWBYZEEoKFBINSQcJGk4NBhADEA4cHktXRVZcSQwSGg0%3D, ComponentLink2Description=DATASHEET, ComponentLink2URL=https://www.lcsc.com/datasheet/C209959.pdf?spm=wm.sxq.inf.ggs___wm.fly.bg.0.xh&lcsc_vid=EVULUAZXQgMNAwVTEQcNAVxTFlNbX1YFFVgNBV1RQ1kxVlNeTlNfX1xWQVBbUjsOAxUeFF5JWBYZEEoKFBINSQcJGk4NBhADEA4cHktXRVZcSQwSGg0%3D, supplier=lcsc, supplier part #=C209959
PIR1: "Pyroelectric infrared sensor", MFR="Senba Sensing Tech", MFR part #=D203S, ComponentLink1Description="New link", ComponentLink1URL=https://www.lcsc.com/product-detail/C78793.html?s_z=n_q_C78793&globalKeyword=C78793, ComponentLink2Description=datasheet, ComponentLink2URL=https://www.lcsc.com/datasheet/C78793.pdf?spm=wm.sxq.inf.ggs&lcsc_vid=EVULUAZXQgMNAwVTEQcNAVxTFlNbX1YFFVgNBV1RQ1kxVlNeTlBaUlBVRVhWUjsOAxUeFF5JWBYZEEoKFBINSQcJGk4dAgUUFAk%3D, supplier=lcsc, supplier part #=C78793
R1 R3: "RES 100kΩ ±1% 125mW 0805", MFR=UNI-ROYAL, MFR part #=0805W8F1003T5E, ComponentLink1Description="New link", ComponentLink1URL=https://www.lcsc.com/product-detail/C149504.html?s_z=n_q_t_100%2520k%25CE%25A9%2520resistor%25200805&spm=wm.fly.bg.0.xh___wm.ssy.tc.0.tz&lcsc_vid=RQUMVgBfFQNaX1cDEQBcUQJeElRWU1MCTwJYVlNRQlExVlNeTlBcV1xUQVlbUjsOAxUeFF5JWBYZEEoKFBINSQcJGk4NBhADEA4cHktXRlhXSQwSGg0%3D, ComponentLink2Description=datasheet, ComponentLink2URL=https://www.lcsc.com/datasheet/C149504.pdf?spm=wm.sxq.inf.ggs___wm.fly.bg.0.xh&lcsc_vid=RQUMVgBfFQNaX1cDEQBcUQJeElRWU1MCTwJYVlNRQlExVlNeTlBcV1xUQVlbUjsOAxUeFF5JWBYZEEoKFBINSQcJGk4NBhADEA4cHktXRlhXSQwSGg0%3D, supplier=lcsc, supplier part #=C149504
R2 R6 R8 R9 R10 R11 R17: "RES 10kΩ ±1% 100mW 0603", MFR=YAGEO, MFR part #=RC0603FR-0710KL, ComponentLink1Description="New link", ComponentLink1URL=https://www.lcsc.com/product-detail/C98220.html?s_z=n_q_p_RES%252010K%2520OHM&spm=wm.ssy.bg.0.xh&lcsc_vid=EgReBFUDQwddVldUQgMNAlFTFlRdVlRRRAUNAVZRRlIxVlNeQFRZX11XRFNaVTsOAxUeFF5JWBYZEEoKFBINSQcJGk4NBhADEA4cHktXRlhXSQwSGg0%3D, ComponentLink2Description="data sheet", ComponentLink2URL=https://www.lcsc.com/datasheet/C98220.pdf?spm=wm.sxq.inf.ggs___wm.ssy.bg.0.xh&lcsc_vid=EgReBFUDQwddVldUQgMNAlFTFlRdVlRRRAUNAVZRRlIxVlNeQFRZX11XRFNaVTsOAxUeFF5JWBYZEEoKFBINSQcJGk4NBhADEA4cHktXRlhXSQwSGg0%3D, supplier=LCSC, supplier part #=C98220
R4 R5 R7: "RES 1MΩ ±1% 125mW 0805", MFR=FOJAN, MFR part #=FRC0805F1004TS, ComponentLink1Description="New link", ComponentLink1URL=https://www.lcsc.com/product-detail/C2933280.html?s_z=n_q_t_1000k%2520ohm&spm=wm.fly.bg.3.xh___wm.ssy.tc.0.tz&lcsc_vid=EVULUAZXQgMNAwVTEQcNAVxTFlNbX1YFFVgNBV1RQ1kxVlNeTlBbXlNSQFZeUDsOAxUeFF5JWBYZEEoKFBINSQcJGk4NBhADEA4cHktXRlhXSQwSGg0%3D, ComponentLink2Description=datasheet, ComponentLink2URL=https://www.lcsc.com/datasheet/C2933280.pdf?spm=wm.sxq.inf.ggs___wm.fly.bg.3.xh&lcsc_vid=EVULUAZXQgMNAwVTEQcNAVxTFlNbX1YFFVgNBV1RQ1kxVlNeTlBbXlNSQFZeUDsOAxUeFF5JWBYZEEoKFBINSQcJGk4NBhADEA4cHktXRlhXSQwSGg0%3D, supplier=lcsc, supplier part #=C2933280
R12 R13 R14 R15 R16 R18: "RES 330Ω ±1% 125mW 0805", MFR=UNI-ROYAL, MFR part #=0805W8F3300T5E, ComponentLink1Description="New link", ComponentLink1URL=https://www.lcsc.com/product-detail/C17630.html?s_z=n_q_0805%2520330%2520ohm%2520resistor&spm=wm.fly.bg.0.xh&lcsc_vid=T1QNA1xeQFcIAlReRFQMVgBVFlhZUV1RE1VaUQcHQgQxVlNeQVZeUVVVRlRZVjsOAxUeFF5JWBYZEEoKFBINSQcJGk4NBhADEA4cHktXRlhXSQwSGg0%3D, ComponentLink2Description="data sheet", ComponentLink2URL=https://www.lcsc.com/datasheet/C17630.pdf?spm=wm.sxq.inf.ggs___wm.fly.bg.0.xh&lcsc_vid=T1QNA1xeQFcIAlReRFQMVgBVFlhZUV1RE1VaUQcHQgQxVlNeQVZeUVVVRlRZVjsOAxUeFF5JWBYZEEoKFBINSQcJGk4NBhADEA4cHktXRlhXSQwSGg0%3D, supplier=LCSC, supplier part #=C17630
R19 R20: "RES 5.1kΩ ±1% 62.5mW 0402", MFR=YAGEO, MFR part #=RC0402FR-075K1L, ComponentLink1Description="New link", ComponentLink1URL=https://www.lcsc.com/product-detail/C105872.html?s_z=n_q_t_res%25205.1k&spm=wm.fly.bg.0.xh___wm.ssy.tc.0.tz&lcsc_vid=EgReBFUDQwddVldUQgMNAlFTFlRdVlRRRAUNAVZRRlIxVlNeQFRfV1JRR1FdXzsOAxUeFF5JWBYZEEoKFBINSQcJGk4dAgUUFAk%3D, ComponentLink2Description="data sheet", ComponentLink2URL=https://www.lcsc.com/datasheet/C105872.pdf?spm=wm.sxq.inf.ggs___wm.fly.bg.0.xh&lcsc_vid=EgReBFUDQwddVldUQgMNAlFTFlRdVlRRRAUNAVZRRlIxVlNeQFRfV1JRR1FdXzsOAxUeFF5JWBYZEEoKFBINSQcJGk4dAgUUFAk%3D, supplier=LCSC, supplier part #=C105872
RGB1: "LED RED, GREEN, BLUE WATER CLEAR SMD", MFR=TOGIALED, MFR part #=TJ-S1608SW6TDSLCCYRGB-A5, ComponentLink1Description="New link", ComponentLink1URL=https://www.lcsc.com/product-detail/C5356078.html?s_z=n_q_C5356078&globalKeyword=C5356078, ComponentLink2Description="New link 1", ComponentLink2URL=https://www.lcsc.com/datasheet/C5356078.pdf?spm=wm.sxq.inf.ggs&lcsc_vid=EVULUAZXQgMNAwVTEQcNAVxTFlNbX1YFFVgNBV1RQ1kxVlNeTlBYVVRfTlVdUTsOAxUeFF5JWBYZEEoKFBINSQcJGk4NBhADEA4cHktSRlNADxALGw%3D%3D, supplier part #=C5356078, upplier=lcsc
SW1: library part RESET_SWITCH, "SWITCH TACTILE SPST 250gf SMD", MFR=hanxia, MFR part #="HX 3x6x2.5A-2.5N", ComponentLink1Description="New link", ComponentLink1URL=https://www.lcsc.com/product-detail/C36498960.html?s_z=n_q_t_Tactile%2520switch&spm=wm.fly.bg.18.stp___wm.ssy.tc.0.tz&lcsc_vid=EVULUAZXQgMNAwVTEQcNAVxTFlNbX1YFFVgNBV1RQ1kxVlNeTlBYVFFeQFNXVTsOAxUeFF5JWBYZEEoKFBINSQcJGk4NBhADEA4cHktRTlNADxALGw%3D%3D, ComponentLink2Description=DATASHEET, ComponentLink2URL=https://www.lcsc.com/datasheet/C36498960.pdf?spm=wm.sxq.inf.ggs___wm.fly.bg.18.stp&lcsc_vid=EVULUAZXQgMNAwVTEQcNAVxTFlNbX1YFFVgNBV1RQ1kxVlNeTlBYVFFeQFNXVTsOAxUeFF5JWBYZEEoKFBINSQcJGk4NBhADEA4cHktRTlNADxALGw%3D%3D, supplier=lcsc, supplier part #=SMD,6x3mm
U1: "Infrared Sensing Signal Processor", MFR=UMW, ComponentLink1Description="New link", ComponentLink1URL=https://www.lcsc.com/product-detail/C404323.html?s_z=n_q_t_BISS0001&spm=wm.fly.bg.0.stp___wm.ssy.tc.0.tz&lcsc_vid=EVULUAZXQgMNAwVTEQcNAVxTFlNbX1YFFVgNBV1RQ1kxVlNeTlBaVF1eTlVcVDsOAxUeFF5JWBYZEEoKFBINSQcJGk4eFQsCAgIaSgADAwAHC0slRVlWUF1WRk8GEwkK, ComponentLink2Description=datasheet, ComponentLink2URL=https://www.lcsc.com/datasheet/C404323.pdf?spm=wm.sxq.inf.ggs___wm.fly.bg.0.stp&lcsc_vid=EVULUAZXQgMNAwVTEQcNAVxTFlNbX1YFFVgNBV1RQ1kxVlNeTlBaVF1eTlVcVDsOAxUeFF5JWBYZEEoKFBINSQcJGk4eFQsCAgIaSgADAwAHC0slRVlWUF1WRk8GEwkK, MFR part #=BISS0001, supplier=lcsc, supplier part #=C404323
U2: "USB to Serial Port chip", MFR=WCH, ComponentLink1Description="New link", ComponentLink1URL=https://www.lcsc.com/product-detail/C84681.html?s_z=n_q_CH340C&spm=wm.fly.bg.0.stp&lcsc_vid=EVULUAZXQgMNAwVTEQcNAVxTFlNbX1YFFVgNBV1RQ1kxVlNeTlBbUVxWRFJfUTsOAxUeFF5JWBYZEEoKFBINSQcJGk4%3D, ComponentLink2Description=DATASHEET, ComponentLink2URL=https://www.lcsc.com/datasheet/C84681.pdf?spm=wm.sxq.inf.ggs___wm.fly.bg.0.stp&lcsc_vid=EVULUAZXQgMNAwVTEQcNAVxTFlNbX1YFFVgNBV1RQ1kxVlNeTlBbUVxWRFJfUTsOAxUeFF5JWBYZEEoKFBINSQcJGk4%3D, MFR part #=CH340C, supplier=lcsc, supplier part #=C84681
U3: "TO-220 plastic-packaged voltage regulator", MFR="BLUE ROCKET", MFR part #=7805A, ComponentLink1Description="New link", ComponentLink1URL=https://www.lcsc.com/product-detail/C7429876.html?s_z=n_q_C7429876&globalKeyword=C7429876, ComponentLink2Description=datasheet, ComponentLink2URL=https://www.lcsc.com/datasheet/C7429876.pdf?spm=wm.sxq.inf.ggs&lcsc_vid=RQUMVgBfFQNaX1cDEQBcUQJeElRWU1MCTwJYVlNRQlExVlNeTlBaVlFQQlZfUzsOAxUeFF5JWBYZEEoKFBINSQcJGk4eFQsCAgIaSgADAwAHC0slRVlaX1ZSRk8GEwkK, supplier=lcsc, supplier part #=C7429876
U4: "8-bit Microcontroller with In-System Programmable Flash", MFR=MICROCHIP, MFR part #=ATMEGA328P-AU, ComponentLink1Description="New link", ComponentLink1URL=https://www.lcsc.com/product-detail/C14877.html?s_z=n_q_t_atmega328p%2520TQFP&spm=wm.fly.bg.0.xh___wm.ssy.tc.0.tz&lcsc_vid=EVULUAZXQgMNAwVTEQcNAVxTFlNbX1YFFVgNBV1RQ1kxVlNeT1ZdUlRQQ1JWUjsOAxUeFF5JWBYZEEoKFBINSQcJGk4NBhADEA4cHktfQ1BADxALGw%3D%3D, ComponentLink2Description=datasheet, ComponentLink2URL=https://www.lcsc.com/datasheet/C14877.pdf?spm=wm.sxq.inf.ggs___wm.fly.bg.0.xh&lcsc_vid=EVULUAZXQgMNAwVTEQcNAVxTFlNbX1YFFVgNBV1RQ1kxVlNeT1ZdUlRQQ1JWUjsOAxUeFF5JWBYZEEoKFBINSQcJGk4NBhADEA4cHktfQ1BADxALGw%3D%3D, supplier=lcsc, supplier part #=C14877
U5: "1A Low Dropout (LDO) Regulator", MFR="Advanced Monolithic Systems", MFR part #=AMS1117-3.3, ComponentLink1Description="New link", ComponentLink1URL=https://www.lcsc.com/product-detail/C6186.html?s_z=n_q_am1117&spm=wm.fly.bg.0.stp&lcsc_vid=T1QNA1xeQFcIAlReRFQMVgBVFlhZUV1RE1VaUQcHQgQxVlNeQVZeVVJeRlVbXzsOAxUeFF5JWBYZEEoKFBINSQcJGk4NBhADEA4cHktXRlVcSQwSGg0%3D, ComponentLink2Description="data sheet", ComponentLink2URL=https://www.lcsc.com/datasheet/C6186.pdf?spm=wm.sxq.inf.ggs___wm.fly.bg.0.stp&lcsc_vid=T1QNA1xeQFcIAlReRFQMVgBVFlhZUV1RE1VaUQcHQgQxVlNeQVZeVVJeRlVbXzsOAxUeFF5JWBYZEEoKFBINSQcJGk4NBhADEA4cHktXRlVcSQwSGg0%3D, supplier=lcsc, supplier part #=C6186
U6: "PUSH-PULL FOUR CHANNEL DRIVER WITH DIODES", MFR=HGSEMI, MFR part #=L293DDM/TR, ComponentLink1Description="New link", ComponentLink1URL=https://www.lcsc.com/product-detail/C2973803.html?s_z=n_q_t_L293D&spm=wm.fly.bg.1.xh___wm.ssy.tc.0.tz&lcsc_vid=EVULUAZXQgMNAwVTEQcNAVxTFlNbX1YFFVgNBV1RQ1kxVlNeT1lfUVRfQFVXUDsOAxUeFF5JWBYZEEoKFBINSQcJGk4NBhADEA4cHktfQ1BADxALGw%3D%3D, ComponentLink2Description=Datasheet, ComponentLink2URL=https://www.lcsc.com/datasheet/C2973803.pdf?spm=wm.sxq.inf.ggs___wm.fly.bg.1.xh&lcsc_vid=EVULUAZXQgMNAwVTEQcNAVxTFlNbX1YFFVgNBV1RQ1kxVlNeT1lfUVRfQFVXUDsOAxUeFF5JWBYZEEoKFBINSQcJGk4NBhADEA4cHktfQ1BADxALGw%3D%3D, supplier=lcsc, supplier part #=C2973803
U7: "ESD DIODE 5.25VWM 17VC SOT-23-6L", MFR=ST, ComponentLink1Description=datasheet, ComponentLink1URL=https://www.lcsc.com/datasheet/C7519.pdf?spm=wm.sxq.inf.ggs___wm.fly.bg.0.stp&lcsc_vid=EgReBFUDQwddVldUQgMNAlFTFlRdVlRRRAUNAVZRRlIxVlNeQFRcVFFXQ1lbVTsOAxUeFF5JWBYZEEoKFBINSQcJGk4NBhADEA4cHktXRlhXSQwSGg0%3D, ComponentLink2Description="New link 1", ComponentLink2URL=https://www.lcsc.com/product-detail/C7519.html?s_z=n_q_USBLC6-2SC6&spm=wm.fly.bg.0.stp&lcsc_vid=EgReBFUDQwddVldUQgMNAlFTFlRdVlRRRAUNAVZRRlIxVlNeQFRcVFFXQ1lbVTsOAxUeFF5JWBYZEEoKFBINSQcJGk4NBhADEA4cHktXRlhXSQwSGg0%3D, MFR part #=USBLC6-2SC6, supplier=lcsc, supplier part #=C7519
X1: library part "16MHz Crystal Oscillator", "CRYSTAL 16MHz 20pF SMD", MFR="YXC Crystal Oscillators", MFR part #=X49SM16MSD2SC, ComponentLink1Description="New link", ComponentLink1URL=https://www.lcsc.com/product-detail/C12676.html, ComponentLink2Description=datasheet, ComponentLink2URL=https://www.lcsc.com/datasheet/C12676.pdf?spm=wm.sxq.inf.ggs&lcsc_vid=EVULUAZXQgMNAwVTEQcNAVxTFlNbX1YFFVgNBV1RQ1kxVlNeT1lfXlBURFlWVzsOAxUeFF5JWAYLCg0IHk8JCAsBGwRABAsLWA%3D%3D, supplier=LCSC, supplier part #=C12676

## Via types
v1: diameter 1.27, hole 0.711, Top Layer to Bottom Layer, 89 vias

## Nets (pads, with @x,y where several pads share a name; then routed paths per layer and width w, separated by ;. In a path a pad name is that pad's centre, name@x,y a point inside that pad or via, vN(x,y) a via of type N, cw(c..) or ccw(c..) an arc to the next point about the centre after c; other vN are vias at no path point)
1IN-: C11.2 C12.2 R5.2 U1.15 | length 17
  Top Layer w0.3: v1(127.889,49.911) C12.2 ; v1(131.318,49.911) 131.191,50.038 131.191,53.467 131.572,53.848 R5.2 C11.2 131.494,56.134 131.318,56.31 U1.15
  Bottom Layer w0.3: v1(127.889,49.911) v1(131.318,49.911)
1OUT: C11.1 C13.1 R5.1 U1.16 | length 8.8
  Top Layer w0.3: U1.16 132.588,57.707 132.764,57.531 134.112,57.531 134.62,57.023 C11.1 R5.1 134.668,53.8 134.668,51.61 C13.1
2IN-: C15.2 R7.2 R8.1 U1.13 | length 7.3
  Top Layer w0.3: U1.13 128.684,58.624 128.684,57.613 128.475,57.404 128.192,57.404 128.016,57.228 R7.2 127.953,56.325 127.953,54.419 C15.2 129.032,54.356 129.158,54.23 129.264,54.124 R8.1
2OUT: C15.1 R7.1 U1.12 | length 5.6
  Top Layer w0.3: C15.1 125.952,54.419 125.952,56.325 125.984,56.356 125.984,57.277 126.238,57.531 127.254,57.531 127.508,57.785 U1.12
+3v3: C17.1 D1.1 J5.2 U5.2 U5.4 | length 32.3
  Top Layer w0.3: U5.2 150.568,97.463 150.622,97.409 ; 154.686,100.076 U5.4 157.48,100.076 ; 158.877,96.774 158.893,96.79 C17.1
  Top Layer w0.5: U5.2 153.148,98.284 153.543,98.679 153.543,99.783 153.836,100.076 154.686,100.076 ; v1(150.622,95.25) 150.622,97.409 ; J5.2 150.622,105.957 150.915,105.664 155.663,105.664 155.956,105.371 U5.4 ; 157.48,100.076 157.607,100.203 D1.1 159.012,100.084 159.012,97.909 C17.1 ; 158.877,96.774 158.877,95.631 v1(159.004,95.504)
+5V: C7.1 C14.1 C16.1 D3.P2 GAS1.1 GAS1.3 GAS1.5 J1.2 J3.2 J5.12 LDR1.2 NTC1.2 PIR1.1 R17.1 RGB1.3 U1.1 U1.9 U1.11 U2.16 U3.2 U4.4 U4.6 U4.18 U5.3 U6.20 | length 72.9
  Top Layer w0.3: 92.71,83.058 U6.20 ; 100.33,99.187 100.457,99.06 100.789,99.06 100.789,98.093 U3.2 ; J3.2 117.348,101.346 ; U1.9 123.753,58.773 123.753,59.823 124.001,60.071 125.984,60.071 126.238,59.817 U1.11 ; 125.222,107.95 J5.12 ; 126.746,83.439 127,83.693 127,84.582 127.127,84.709 127.127,84.736 127.303,84.912 U4.4 ; 127.254,83.312 U4.6 130.048,83.312 130.848,82.512 U4.18 ; U1.1 132.748,64.378 132.748,65.065 132.969,65.286 ; U2.16 v1@134.112,104.521 ; 142.24,115.951 NTC1.2 ; 145.923,90.678 D3.P2 ; 149.098,102.489 149.098,102.708 150.392,102.708 U5.3
  Top Layer w0.4: v1@125.222,107.188 125.222,107.95
  Top Layer w0.5: v1(91.059,83.058) 92.71,83.058 ; v1(100.203,102.489) 100.251,102.441 100.251,100.378 C7.1 100.298,99.219 100.33,99.187 ; PIR1.1 108.839,69.596 109.855,70.612 109.943,70.612 110.236,70.905 J1.2 110.172,72.962 110.172,75.755 v1(110.109,75.819) ; 117.348,101.346 v1(118.364,101.346) ; v1(123.244,83.566) 123.3,83.51 125.675,83.51 125.746,83.439 126.746,83.439 126.873,83.312 127.254,83.312 ; v1(125.222,106.68) v1@125.222,107.188 ; 132.969,65.286 133.751,65.286 133.87,65.405 v1(135.255,65.405) ; v1@134.112,104.521 134.444,104.853 v1(134.444,105.057) ; v1(134.112,119.888) GAS1.3 134.112,116.467 134.405,116.174 134.573,116.174 134.669,116.078 136.486,116.078 136.486,115.228 GAS1.5 ; GAS1.1@139.065,117.475 GAS1.1 v1(139.192,119.888) ; v1(141.351,115.951) 142.24,115.951 ; v1(145.034,90.678) 145.923,90.678 ; v1(146.173,102.1) 146.177,102.096 147.824,102.096 C16.1 147.844,102.108 148.805,102.108 149.098,102.401 149.098,102.489 ; LDR1.2 v1(153.162,117.094)
A0: J5.4 LDR1.1 R9.1 U4.23 | length 37.6
  Top Layer w0.3: U4.23 136.804,86.487 137.619,86.487 137.795,86.663 137.795,87.249 139.065,88.519 140.208,88.519 141.732,90.043 142.367,90.043 142.875,90.551 142.875,93.726 143.51,94.361 144.604,94.361 144.78,94.537 144.78,106.807 145.542,107.569 J5.4 145.298,109.718 145.298,110.385 145.288,110.395 145.288,110.695 145.464,110.871 146.382,110.871 146.558,111.047 R9.1 LDR1.1
A1: J5.5 NTC1.1 R11.1 U4.24 | length 35.5
  Top Layer w0.3: U4.24 137.24,87.312 137.541,87.613 137.541,88.773 138.049,89.281 139.319,89.281 141.986,91.948 141.986,94.107 143.383,95.504 143.969,95.504 144.145,95.68 144.145,105.791 143.002,106.934 J5.5 143.002,110.822 143.178,110.998 144.145,110.998 144.526,111.379 144.526,115.775 144.35,115.951 NTC1.1
A2: GAS1.4 GAS1.6 J5.6 R10.1 U4.25 | length 39.4
  Top Layer w0.3: GAS1.4 134.112,112.903 134.493,112.522 R10.1 ; U4.25 135.402,88.785 135.402,89.76 135.685,90.043 136.222,90.043 136.398,90.219 v1(136.398,91.186) ; GAS1.6 139.244,115.01 139.244,112.575 R10.1 ; v1(142.113,105.791) 142.113,106.504 141.937,106.68 140.843,106.68 140.462,107.061 J5.6 140.462,110.998 140.208,111.252 139.495,111.252 139.319,111.428 139.319,112.5 R10.1
  Bottom Layer w0.3: v1(136.398,91.186) 136.525,91.186 136.779,91.44 136.779,91.567 137.287,92.075 137.541,92.075 140.208,94.742 140.208,96.52 142.113,98.425 v1(142.113,105.791)
A3: J5.7 U4.26 | length 25.1
  Top Layer w0.3: U4.26 134.554,90.485 135.128,91.059 135.128,92.039 v1(136,92.911) ; J5.7 137.922,107.237 138.098,107.061 139.065,107.061 139.827,106.299 139.827,106.172 140.081,105.918 v1(140.081,105.664)
  Bottom Layer w0.3: v1(136,92.911) 136.041,92.952 136.894,92.952 139.319,95.377 139.319,96.901 140.208,97.79 140.208,105.537 v1(140.081,105.664)
A4: J5.8 U4.27 | length 28.1
  Top Layer w0.3: v1(133.347,106.445) 133.424,106.368 134.689,106.368 135.382,107.061 J5.8 ; U4.27 133.754,92.567 134.289,93.103 v1(134.289,93.365)
  Bottom Layer w0.3: v1(133.347,106.445) 133.342,106.441 133.342,105.21 132.395,104.263 132.395,102.809 137.922,97.282 137.922,94.869 137.033,93.98 135.001,93.98 134.386,93.365 v1(134.289,93.365)
A5: J5.9 U4.28 | length 24.3
  Top Layer w0.3: v1(131.598,106.172) 131.572,106.172 131.064,106.68 131.064,107.52 131.24,107.696 132.334,107.696 132.842,108.204 J5.9 ; v1(132.08,94.869) 133.096,93.853 133.096,90.297 132.954,90.155 U4.28
  Bottom Layer w0.3: v1(131.598,106.172) 131.598,100.102 130.048,98.552 130.048,97.028 131.953,95.123 131.953,94.996 v1(132.08,94.869)
A6: J5.10 U4.19 | length 34.8
  Top Layer w0.3: v1(127,90.932) 127,94.234 127.889,95.123 127.889,97.79 130.937,100.838 130.937,105.156 130.302,105.791 J5.10 ; v1(134.366,83.82) 134.628,83.82 135.136,83.312 U4.19
  Bottom Layer w0.3: v1(127,90.932) 127,89.789 129.794,86.995 132.412,86.995 132.588,86.819 132.588,85.598 v1(134.366,83.82)
A7: J5.11 U4.22 | length 46.6
  Top Layer w0.3: v1(127.522,106.66) 127.612,106.75 127.612,107.745 127.762,107.895 J5.11 ; U4.22 137.873,85.712 138.303,86.142 138.303,86.868 139.192,87.757 141.96,87.757 142.029,87.825 142.435,87.825 v1(142.621,88.011)
  Bottom Layer w0.25: v1(127.522,106.66) 128.161,106.022 129.54,106.022 130.833,107.315 142.875,107.315 144.018,106.172 144.018,89.424 142.621,88.027 v1(142.621,88.011)
AREF: C18.1 J5.3 U4.20 | length 34.7
  Top Layer w0.3: U4.20 139.446,84.112 142.278,84.112 142.494,84.328 142.494,85.979 143.764,87.249 143.764,93.423 143.94,93.599 145.161,93.599 146.177,94.615 146.177,96.239 145.288,97.128 145.288,103.759 148.082,106.553 J5.3
D2: J6.5 R16.1 U4.32 | length 44.9
  Top Layer w0.3: J6.5 129.54,71.374 130.175,70.739 133.731,70.739 133.857,70.613 134.747,69.723 134.747,67.945 136.652,66.04 136.652,60.374 136.828,60.198 138.557,60.198 138.683,60.072 139.192,59.563 139.192,58.088 139.543,57.736 R16.1 ; U4.32 129.754,86.273 v1(130.81,85.217)
  Top Layer w0.35: v1(127.762,78.994) 127.788,78.968 127.788,78.079 128.016,77.851 128.016,77.216 128.27,76.962 128.27,76.581 129.54,75.311 J6.5
  Bottom Layer w0.3: v1(127.762,78.994) 127.7,79.056 127.7,85.041 127.876,85.217 v1(130.81,85.217)
D3: J1.3 J6.6 U4.1
D4: J6.7 R14.1 U4.2 | length 8.9
  Top Layer w0.3: J6.7 134.62,71.501 136.017,70.104 136.017,67.818 137.407,66.428 138.345,66.428 R14.1
D5: J6.8 U4.9 U6.1 | length 68.9
  Top Layer w0.3: U6.1 106.291,83.058 106.545,82.804 v1(106.807,82.804) ; U4.9 129.754,79.275 129.032,78.553 129.032,77.343 131.064,75.311 134.874,75.311 135.509,74.676 136.984,74.676 137.16,74.5 J6.8 137.224,72.834 137.224,69.913 v1(137.287,69.85)
  Bottom Layer w0.3: v1(106.807,82.804) 106.807,79.932 106.631,79.756 105.029,79.756 103.886,78.613 103.886,70.358 104.394,69.85 v1(137.287,69.85)
D6: J6.9 U1.2 U4.10 | length 31.1
  Top Layer w0.3: U4.10 130.554,76.71 131.318,75.946 135.255,75.946 136.017,75.184 138.557,75.184 139.7,74.041 J6.9 139.763,72.834 139.763,70.04 v1(139.827,69.977) ; U1.2 131.318,65.61 131.494,65.786 132.461,65.786 132.715,66.04 133.096,66.04 133.35,66.294 133.731,66.294 134.239,66.802 v1(134.239,67.056)
  Bottom Layer w0.3: v1(134.239,67.056) 139.192,67.056 139.7,67.564 139.7,69.85 v1(139.827,69.977)
D7: J6.10 R15.1 U4.11 | length 19.6
  Top Layer w0.3: U4.11 131.354,77.392 131.356,77.389 132.165,76.581 135.763,76.581 136.525,75.819 140.208,75.819 141.097,74.93 141.986,74.93 142.24,74.676 J6.10 142.113,72.771 142.113,71.374 141.986,71.247 R15.1
D8: D2.1 J6.11 U4.12 | length 24.1
  Top Layer w0.3: U4.12 132.154,77.392 132.33,77.216 136.398,77.216 137.16,76.454 141.478,76.454 142.303,75.629 143.192,75.629 144.78,74.041 J6.11 144.78,69.85 145.161,69.469 D2.1
D9: BZ1.P J6.12 U4.13 | length 28.5
  Top Layer w0.3: U4.13 132.954,78.247 133.477,77.724 137.033,77.724 137.668,77.089 143.129,77.089 144.177,76.041 145.083,76.041 147.198,73.926 147.198,73.02 J6.12 147.32,71.247 147.448,71.119 147.574,70.993 149.225,70.993 149.86,70.358 152.351,70.358 152.527,70.182 152.527,68.311 BZ1.P
D10: J6.13 U4.14 U6.2 | length 20.8
  Top Layer w0.3: U4.14 133.754,78.717 134.112,78.359 137.414,78.359 138.049,77.724 143.637,77.724 144.526,76.835 145.923,76.835 147.701,75.057 148.971,75.057 149.86,74.168 J6.13
D11/MOSI: J2.1 J6.14 U4.15 U6.9 | length 99.3
  Top Layer w0.3: U6.9 105.156,93.218 105.791,93.853 105.791,94.107 106.172,94.488 106.172,97.917 106.934,98.679 J2.1 111.506,97.028 111.252,96.774 109.601,96.774 109.474,96.647 v1(109.474,94.615) ; U4.15 134.554,79.043 134.73,78.867 137.795,78.867 138.176,78.486 145.034,78.486 145.545,77.975 146.428,77.975 v1(146.431,77.978) 149.225,77.978 150.241,76.962 152.351,76.962 152.527,76.786 152.527,73.025 J6.14
  Bottom Layer w0.3: v1(109.474,94.615) 109.602,94.615 111.126,93.091 111.126,80.518 111.824,79.819 111.824,78.422 112.777,77.47 112.777,77.342 115.57,74.549 146.256,74.549 146.432,74.725 v1(146.431,77.978)
D12/MISO: J3.1 J6.15 U4.16 | length 88.2
  Top Layer w0.3: v1(115.697,94.742) J3.1 ; U4.16 135.402,80.239 135.402,79.443 135.578,79.267 137.961,79.267 138.234,78.994 143.637,78.994 144.526,79.883 v1(145.288,79.883) 150.114,79.883 151.638,78.359 154.178,78.359 154.94,77.597 J6.15
  Bottom Layer w0.3: v1(115.697,94.742) 115.316,95.123 113.411,95.123 112.649,94.361 112.649,79.121 116.586,75.184 144.907,75.184 145.288,75.565 v1(145.288,79.883)
D13/SCK: J3.3 J5.1 R18.1 U4.17 | length 45.6
  Top Layer w0.2: J3.3 118.237,103.886 118.618,104.267 119.38,104.267 120.777,105.664 128.143,105.664 129.159,106.68 v1(129.159,107.696) ; v1(153.035,106.934) 153.099,106.998 153.099,109.41 J5.1
  Top Layer w0.3: U4.17 137.973,81.712 138.43,82.169 R18.1
  Bottom Layer w0.2: v1(129.159,107.696) 137.686,107.696 137.94,107.95 146.177,107.95 147.193,106.934 v1(153.035,106.934)
ESD_D_N: U2.6 U7.6 | length 30.2
  Top Layer w0.3: U2.6 140.462,96.901 141.465,95.898 v1(141.519,95.898) ; U7.6 145.288,84.074 145.034,83.82 145.034,82.804 v1(146.939,80.899)
  Bottom Layer w0.3: v1(141.519,95.898) 141.519,94.402 140.752,93.635 140.206,93.635 139.664,93.093 139.664,92.327 139.7,92.29 139.7,83.693 143.002,80.391 144.487,80.391 144.905,80.808 146.848,80.808 v1(146.939,80.899)
ESD_D_P: U2.5 U7.4 | length 18.6
  Top Layer w0.3: U2.5 139.192,94.107 v1(140.589,92.71) ; v1(144.907,87.122) 144.907,86.233 145.166,85.974 U7.4
  Bottom Layer w0.3: v1(140.589,92.71) 140.589,88.519 142.748,86.36 144.145,86.36 144.399,86.614 144.399,86.868 144.412,86.868 144.666,87.122 v1(144.907,87.122)
GND: BZ1.N C2.2 C3.2 C4.2 C5.2 C6.2 C7.2 C8.2 C10.2 C14.2 C16.2 C17.2 C18.2 D4.2 GAS1.2 J1.1 J2.3 J4.A1 J4.A12 J4.S1 J4.S2 J4.S3 J4.S4 J5.14 J6.4 PIR1.3 R1.1 R3.1 R6.1 R9.2 R10.2 R11.2 R12.1 R13.2 R19.2 R20.2 SW1.1 U1.7 U1.10 U2.1 U3.3 U4.3 U4.5 U4.21 U5.1 U6.4 U6.5 U6.6 U6.7 U6.14 U6.15 U6.16 U6.17 U7.2 | length 159.1
  Top Layer w0.2: 109.22,51.435 109.236,51.451 R1.1
  Top Layer w0.25: 127.101,85.725 127.114,85.712 U4.3
  Top Layer w0.3: 92.583,88.138 U6.16 ; 92.583,89.408 U6.15 ; 92.71,86.868 U6.17 ; 92.71,90.678 U6.14 ; U3.3 98.425,99.06 ; 101.6,88.138 U6.5 ; 102.108,86.868 U6.4 ; 102.235,89.408 U6.6 ; 102.362,90.678 U6.7 ; C6.2 105.394,101.711 105.41,101.727 ; 109.601,103.759 J2.3 ; C4.2 120.44,81.534 120.904,81.534 ; C3.2 120.666,89.027 121.158,89.027 ; 121.031,102.997 SW1.1 ; 124.714,57.277 124.968,57.531 U1.10 ; 126.476,85.455 126.831,85.455 127.101,85.725 ; 126.873,74.295 126.873,73.025 J6.4 ; 132.969,96.901 133.936,96.901 134.112,97.077 U2.1 ; U4.21 138.125,84.912 138.684,85.471 138.684,85.914 139.27,85.914 C18.2 ; D4.2 142.24,82.423 142.875,82.423 ; 146.431,62.992 146.461,63.022 R12.1 ; 149.098,100.33 149.352,100.584 U5.1 ; U7.2 150.175,85.024 150.18,85.029 150.429,85.029 150.495,84.963 ; 154.94,81.28 155.321,80.899 155.321,80.772 155.6,80.493 J4.A1 156.591,80.442 156.591,80.059 156.767,79.883 157.035,79.883 157.035,79.453 J4.S1 J4.S3 ; 155.448,88.011 155.455,88.018 J4.S2 158.616,88.018 158.623,88.011 161.283,88.011 J4.S4 ; 155.702,86.868 156.515,86.868 J4.A12 ; C17.2 v1@162.306,97.79 ; R13.2 162.814,100.711
  Top Layer w0.4: 98.298,99.568 98.298,99.187 98.425,99.06 ; 120.523,102.997 121.031,102.997 ; C5.2@121.15,61.984 124.595,61.984 124.968,62.357 U1.7 ; v1(152.908,86.741) R19.2